# Allegro board CutiePi_V2_3.brd
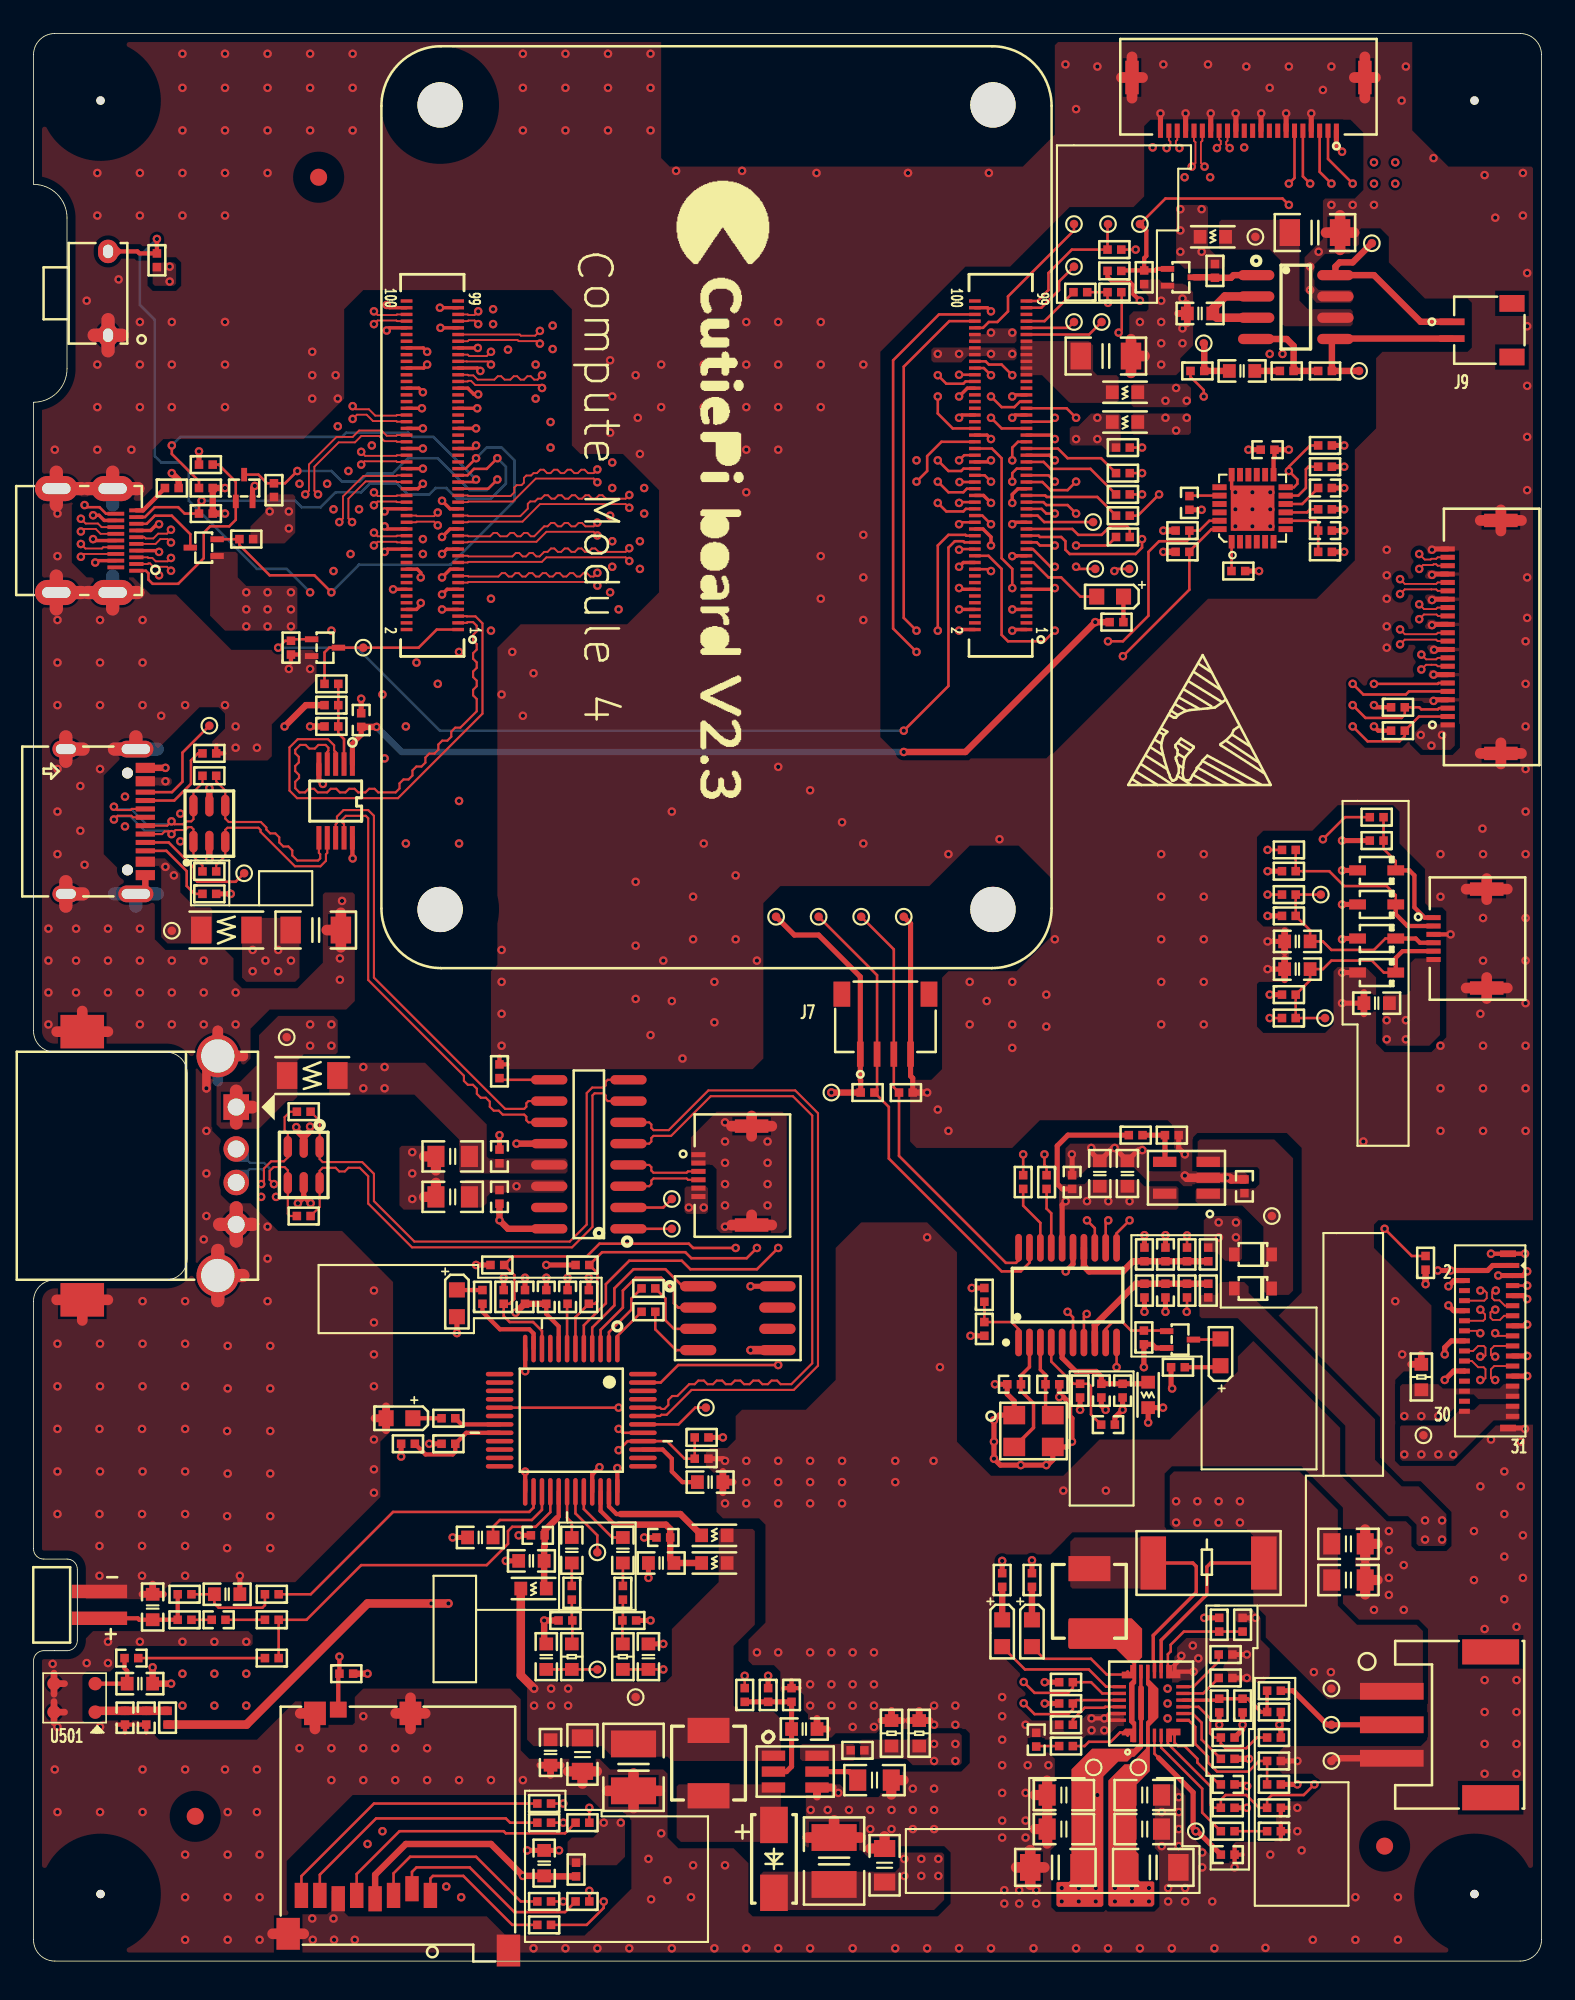
[diagram p0: board, top side]
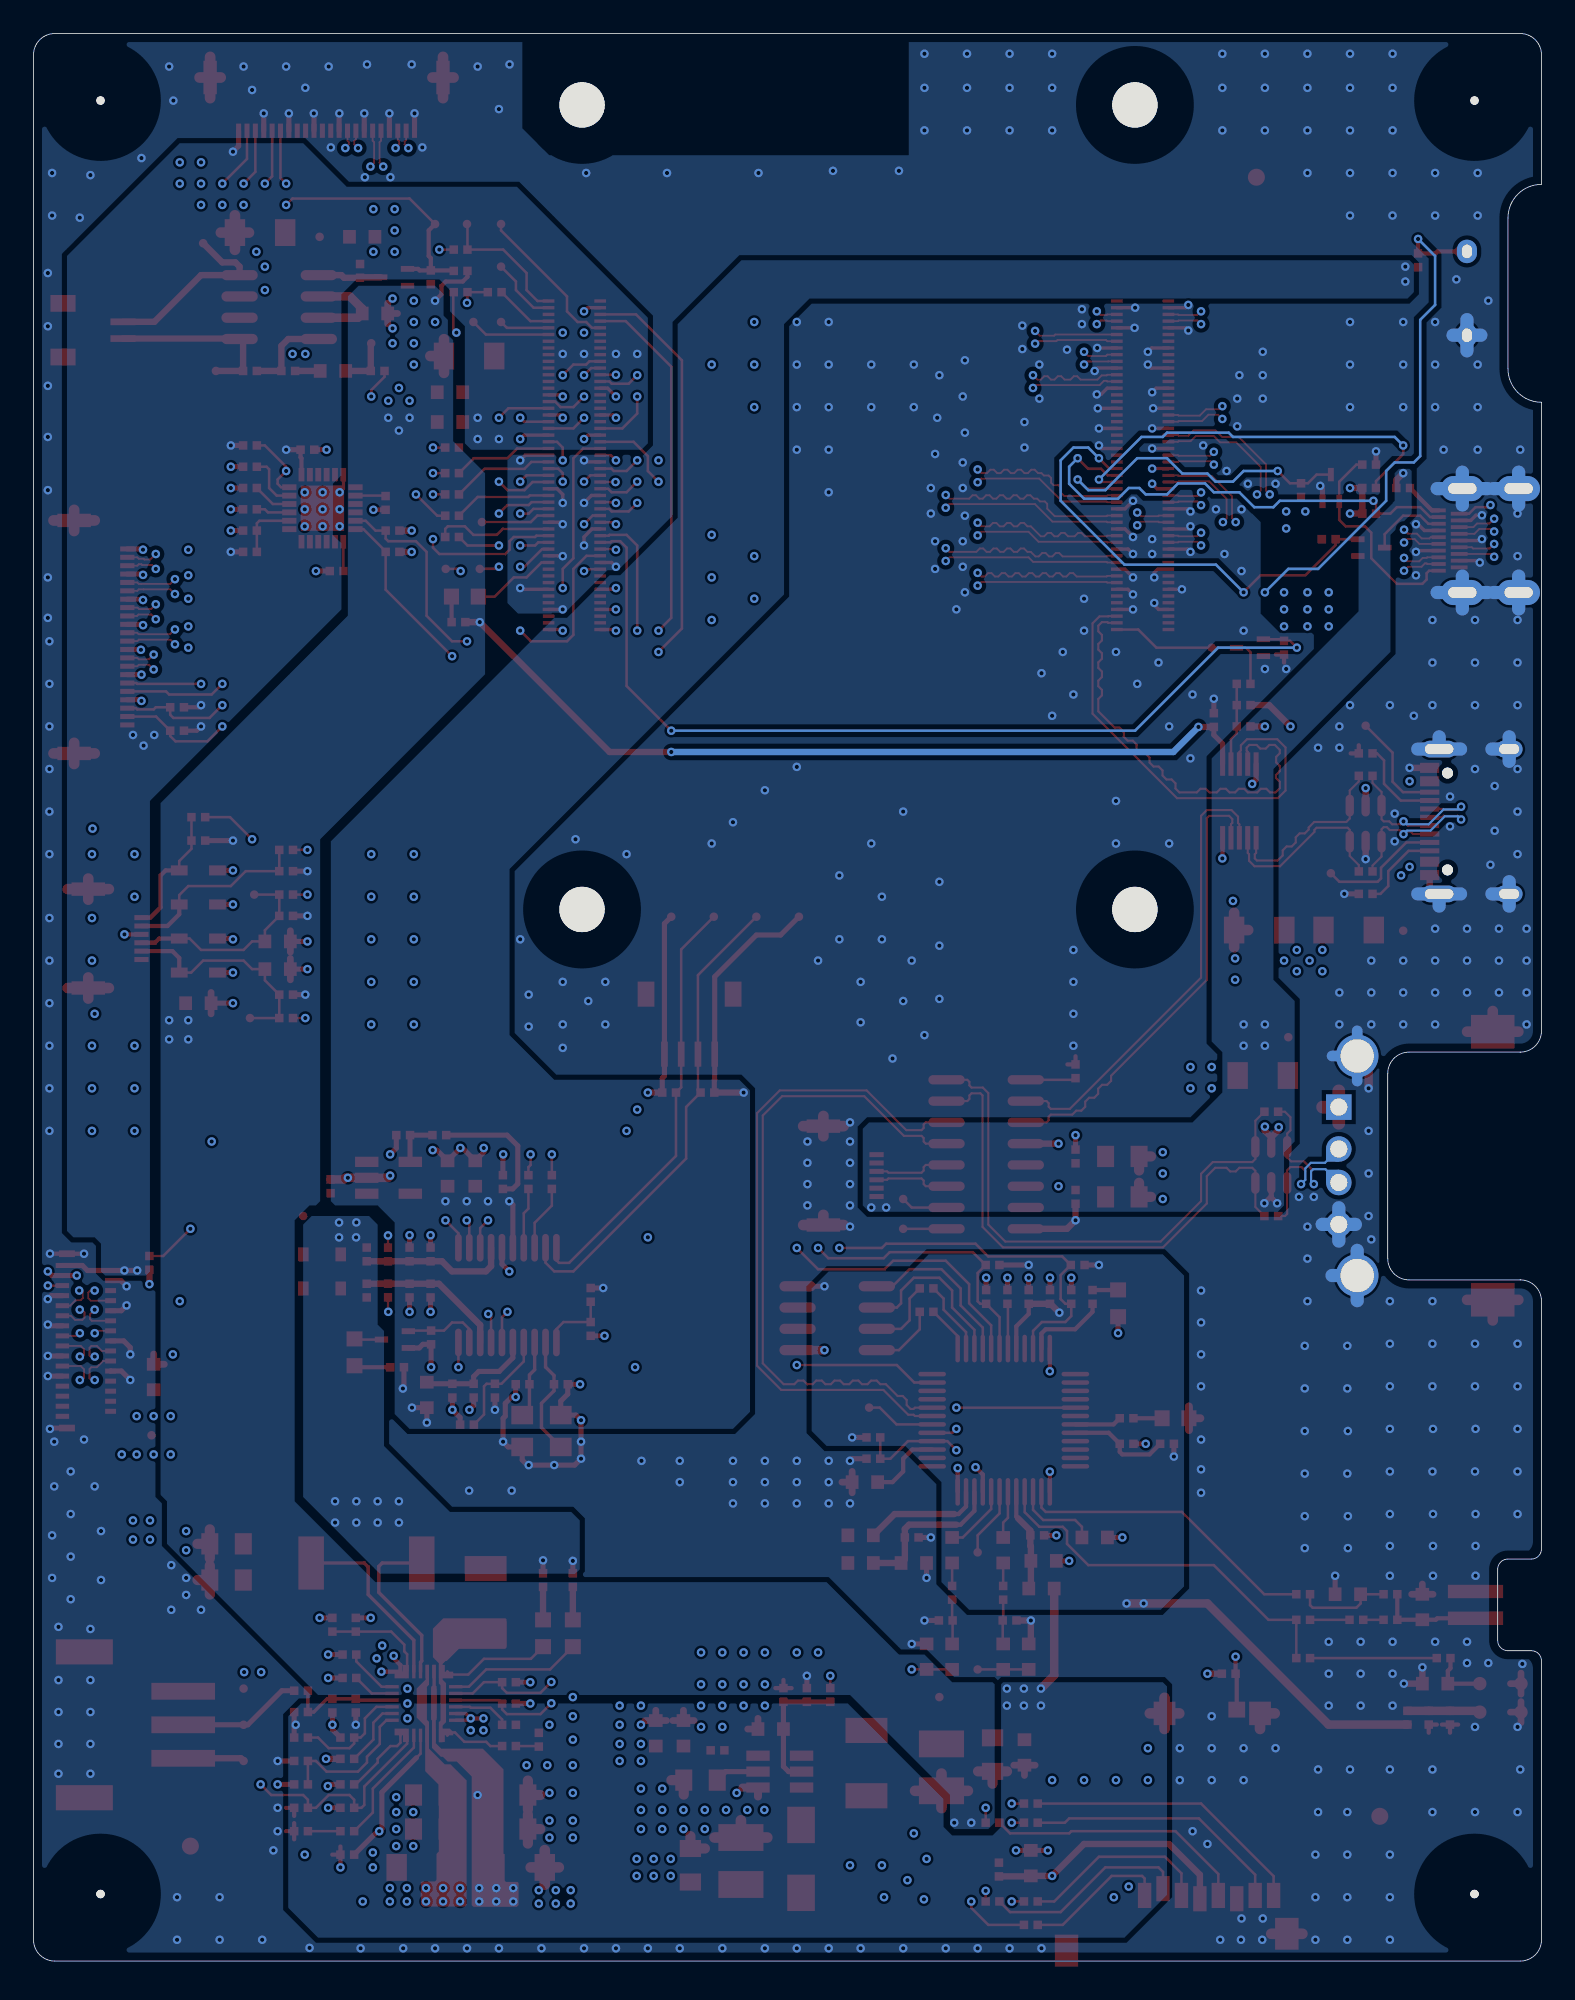
[diagram p1: board, bottom side, seen from below]

Outline 90.01 x 115 mm; copper layers: TOP, GND02, L03, L04, GND05, BOTTOM. Coordinates in mm from the lower left corner of the outline.
Outline path: 0,113.73 arc(0.37,114.63) 1.27,115 88.74,115 arc(89.64,114.63) 90.01,113.73 90.01,1.27 arc(89.64,0.37) 88.74,0 1.27,0 arc(0.37,0.37) 0,1.27 0,17.91 arc(0.18,18.34) 0.61,18.52 1.27,18.52 2.01,18.52 arc(2.44,18.7) 2.62,19.13 2.62,23.37 arc(2.44,23.8) 2.01,23.98 0.61,23.98 arc(0.18,24.16) 0,24.59 0,39.37 arc(0.37,40.27) 1.27,40.64 7.91,40.64 arc(8.81,41.01) 9.18,41.91 9.18,52.96 arc(8.81,53.86) 7.91,54.23 1.27,54.23 arc(0.37,54.6) 0,55.5 0,93 arc(1.41,93.59) 2,95 2,104 arc(1.41,105.41) 0,106 0,113.73

## Design rules (mm)
net group DP_N12951086: nets N12951060 N12951086
net group N13167521: nets N13167521 N13167621
net group RXD0: nets N12403491 RXD0
net group TXD0: nets N12403489 TXD0
net group USB1_: nets USB1_DM USB1_DP
net group USB2_: nets USB2_DM USB2_DP
net group USB3_DM: nets USB3_DM USB3_DP
net group USB_DP: nets USB_DN USB_DP
net group USBH_DP: nets USBH_DN USBH_DP
net group USBS_DN: nets USBS_DN USBS_DP
net group BOOST_EN: nets BOOST_EN CHARGE_EN N12951318
net group CAM0: nets CAM0_CN CAM0_CP CAM0_DN0 CAM0_DN1 CAM0_DP0 CAM0_DP1
net group CAM1: nets CAM1_CN CAM1_CP CAM1_DN0 CAM1_DN1 CAM1_DN2 CAM1_DN3 CAM1_DP0 CAM1_DP1 CAM1_DP2 CAM1_DP3
net group DSI1: nets DSI1_CN DSI1_CP DSI1_DN0 DSI1_DN1 DSI1_DN2 DSI1_DN3 DSI1_DP0 DSI1_DP1 DSI1_DP2 DSI1_DP3
net group HDMI1: nets HDMI_CK_N HDMI_CK_P HDMI_D0_N HDMI_D0_P HDMI_D1_N HDMI_D1_P HDMI_D2_N HDMI_D2_P
net group VBUSA: nets N12836963

## Placement (name value [footprint] x y rotation side)
C2  47u/6.3V  [C1206]  16.85 61.51 0 top
C17  -  [C0402]  19.56 74.04 270 top
C20  47u/6.3V  [C1206]  76.49 103.12 0 top
C24  4.7u/16V  [C0603]  30.48 5.84 90 top
C68  0.1uF/50V  [C0603]  30.86 12.45 270 top
C69  1.0uF/25V  [C0805]  32.77 12.32 270 top
C73  0.1uF/50V  [C0603]  46.01 13.84 0 top
C74  0.22uF/50V  [C0805]  50.2 10.79 0 top
C76  4.7uF/50V  [C1210]  47.79 5.97 90 top
C78  0.22uF/50V  [C0805]  50.8 5.71 90 top
C80  0.1uF/50V  [C0603]  80.17 57.15 180 top
C81  0.1uF/50V  [C0603]  75.44 60.83 180 top
C82  1000pF/50V  [C0603]  75.44 59.18 180 top
C85  4.7uF/50V  [C1210]  35.81 11.56 90 top
C86  4.7u/16V  [C0603]  69.63 98.3 180 top
C87  0.39u/16V  [C0603]  72.14 94.87 0 top
C383  -  [C0402]  77.09 85.34 0 top
C384  -  [C0402]  77.09 87.88 0 top
C385  -  [C0402]  73.66 90.17 180 top
C386  -  [C0402]  68.99 87 90 top
C2474  -  [C0402]  63.74 34.03 270 top
C2475  -  [C0402]  58.53 34.41 180 top
C2476  -  [C0402]  60.82 34.41 0 top
C2477  -  [C0402]  61.99 46.48 90 top
C2478  4.7u/16V  [C0603]  63.64 46.99 90 top
C2479  -  [C0402]  65.01 34.03 270 top
C2480  -  [C0402]  72.28 46.22 90 top
C2481  4.7u/16V  [C0603]  65.29 46.99 90 top
C2483  -  [C0402]  59.85 13.21 270 top
C2484  47u/6.3V  [C1206]  60.99 5.59 180 top
C2485  10u/16V  [C0805]  61.5 7.87 180 top
C2486  10u/16V  [C0805]  61.5 9.91 180 top
C2487  47u/6.3V  [C1206]  66.84 5.59 0 top
C2488  10u/16V  [C0805]  66.33 7.87 0 top
C2489  10u/16V  [C0805]  66.33 9.91 0 top
C2490  10u/16V  [C0805]  78.49 24.89 0 top
C2491  10u/16V  [C0805]  78.49 22.73 0 top
C2492  -  [C0402]  71.28 6.35 0 top
C2493  -  [C0402]  71.28 10.54 0 top
C2495  -  [C0402]  27.81 48.01 90 top
C2496  10u/16V  [C0805]  25.02 48.01 180 top
C2497  10u/16V  [C0805]  25.02 45.59 180 top
C2501  4.7u/16V  [C0603]  29.72 23.88 180 top
C2502  -  [C0402]  30.1 25.4 180 top
C2503  -  [C0402]  37.59 25.27 180 top
C2504  4.7u/16V  [C0603]  37.47 23.75 180 top
C2505  47u/6.3V  [C1206]  64.01 95.76 0 top
C2507  4.7u/16V  [C0603]  26.67 25.27 180 top
C2508  -  [C0402]  6.73 14.52 90 top
C2509  -  [C0402]  5.46 14.52 270 top
C2510  100pF  [C0603]  6.35 16.55 0 top
C2511  -  [C0402]  30.61 39.62 90 top
C2512  -  [C0402]  27.81 45.59 270 top
C2513  val*  [C0603]  40.39 28.57 0 top
C2514  -  [C0402]  29.34 39.62 90 top
C2515  -  [C0402]  31.88 39.62 90 top
C2516  val*  [C0603]  35.18 24.51 270 top
C2517  val*  [C0603]  36.7 18.16 270 top
C2518  val*  [C0603]  32.13 24.51 270 top
C2519  val*  [C0603]  30.61 18.16 90 top
C2520  val*  [C0603]  11.56 21.88 0 top
C2521  -  [C0402]  11.05 20.36 180 top
C2522  val*  [C0603]  7.11 21.12 90 top
C2523  -  [C0402]  64.14 32 0 top
C2524  -  [C0402]  5.84 18.07 180 top
C2525  -  [C0402]  67.56 42.16 90 top
C2526  -  [C0402]  67.56 40 270 top
D1  -  [LED0603]  64.26 81.41 0 top
D10  SS14-M3/61T  [DO-214AC]  44.2 6.1 90 top
D11  ESDLIN1524BJ  [SOD323]  80.17 63.04 0 top
D12  ESDLIN1524BJ  [SOD323]  80.17 65.07 0 top
D13  ESDLIN1524BJ  [SOD323]  80.17 58.97 0 top
D14  ESDLIN1524BJ  [SOD323]  80.17 61.01 0 top
D17  BAT54HT1  [DIO-SOD323]  72.79 40.13 180 top
D18  BAT54HT1  [DIO-SOD323]  72.79 42.16 180 top
D19  -  [LED0603]  70.85 36.32 270 top
D20  -  [LED0603]  57.82 19.56 90 top
D21  -  [LED0603]  59.6 19.56 90 top
D22  -  [LED0603]  25.27 39.24 90 top
D23  -  [LED0603]  21.84 32.38 0 top
F1  6V/2A  [1206]  11.51 61.51 0 top
F2  6V/0.5A  [1206]  16.64 52.83 180 top
FB2  BLM18PG121SH1  [SL0603]  70.39 102.87 0 top
FB7  BLM18PG121SH1  [SL0603]  66.53 33.78 90 top
FB8  BLM18PG121SH1  [SL0603]  40.64 23.75 0 top
FB9  BLM18PG121SH1  [SL0603]  29.84 22.23 180 top
FB10  BLM18PG121SH1  [SL0603]  65.15 93.6 180 top
FB12  BLM18PG121SH1  [SL0603]  65.15 91.82 180 top
FB13  val*  [SL0603]  40.64 25.4 0 top
J2  VAL  [TYPEC_6446_116FH1301]  4.02 67.99 270 top
J7  -  [SH1_0_4]  50.85 54.11 180 top
J9  -  [SH1_0_2]  84.67 97.3 90 top
J11  VAL  [CONFPC22_05MM_FH52_A]  86 79 90 top
J13  467651001  [MICRO_HDMI]  5.53 84.75 270 top
J14  -  [USB_AM]  12.1 47.45 0 top
J16  473521001_sd  [MOLEX_473521001]  21.78 7.81 0 top
J17  FH52-6S-0.5SH  [CONFPC6_05MM_FH52]  85.15 61 90 top
J21  FH26W-31S-0.3SHW  [CONFPC31_03MM_FH26W]  86.85 37 90 top
J23  VAL  [PH2_0_3]  81.07 14.1 270 top
J24  DF40C-100DS-0.4V  [FCI_10033853_CM]  57.73 89.24 270 top
J25  DF40C-100DS-0.4V  [FCI_10033853_CM]  23.81 89.24 270 top
J26  VAL  [CONFPC22_05MM_FH52_A]  72.52 110.79 180 top
J27  VAL  [MIC_4_5]  3.94 21.25 270 top
J28  VAL  [CONFPC6_05MM_FH52]  41.27 46.86 90 top
L5  10uH/20%  [SHC0402]  40.29 11.81 270 top
L634  1.5u  [SHC0402]  63.03 21.46 90 top
NOREF  -  [unnamed]  86.01 111 0 top
NOREF#2  -  [#2]  -66.42 -5.33 0 top
NOREF#3  -  [unnamed]  4 4 0 top
NOREF#4  -  [#2]  -66.42 36.7 0 top
NOREF#5  val  [unnamed#2]  24.27 110.74 0 top
NOREF#6  val  [unnamed#2]  57.27 110.74 0 top
NOREF#7  val  [unnamed#2]  24.27 62.74 0 top
NOREF#8  -  [#2]  41.4 90.09 270 top
NOREF#9  val  [unnamed#2]  57.27 62.74 0 top
NOREF#10  -  [unnamed]  86.01 4 0 top
NOREF#11  -  [#2]  40.77 86.74 0 top
NOREF#12  -  [unnamed#3]  80.64 6.86 0 top
NOREF#13  -  [unnamed#3]  9.65 8.64 0 top
NOREF#14  -  [#2]  -58.9 96.01 0 top
NOREF#15  -  [unnamed#3]  17.02 106.43 0 top
NOREF#16  -  [unnamed]  4 111 0 top
NOREF#17  -  [#2]  65.14 70.04 0 top
Q3  -  [SOT50P160X90-3N]  10.16 84.33 180 top
Q4  -  [SOT50P160X90-3N]  12.57 87.88 90 top
Q5  -  [SOT50P160X90-3N]  68.44 37.08 0 top
Q6  -  [SOT50P160X90-3N]  68.49 100.46 0 top
Q7  -  [SOT50P160X90-3N]  17.4 78.36 0 top
R3  -  [R0402]  64.64 79.88 0 top
R15  -  [R0402]  12.7 84.84 0 top
R16  -  [R0402]  81.44 74.8 0 top
R17  -  [R0402]  81.44 73.41 0 top
R18  -  [R0402]  14.35 87.76 270 top
R42  -  [R0402]  74.93 66.29 180 top
R43  -  [R0402]  80.17 68.25 180 top
R87  -  [R0402]  45.25 15.88 270 top
R88  -  [R0402]  42.45 15.88 90 top
R89  -  [R0402]  49.18 12.57 180 top
R90  3.3/1%  [R0603]  52.87 13.59 90 top
R91  3.3/1%  [R0603]  51.21 13.59 90 top
R114  -  [R0402]  74.93 65.02 180 top
R115  -  [R0402]  80.17 66.85 180 top
R117  -  [R0402]  74.93 62.36 0 top
R118  -  [R0402]  74.93 57.66 0 top
R120  -  [R0402]  74.93 56.26 180 top
R121  -  [R0402]  74.93 63.63 180 top
R122  -  [R0402]  16.13 44.45 180 top
R123  -  [R0402]  16.13 50.67 180 top
R124  -  [R0402]  70.52 100.84 270 top
R125  -  [R0402]  77.09 94.87 180 top
R126  -  [R0402]  74.8 94.87 180 top
R127  -  [R0402]  69.47 94.87 0 top
R272  -  [R0402]  62.47 34.03 270 top
R368  -  [R0402]  71.92 82.93 180 top
R370  -  [R0402]  77.09 84.07 180 top
R371  -  [R0402]  77.09 89.15 180 top
R373  -  [R0402]  77.09 86.61 180 top
R3039  -  [R0402]  56.75 37.71 270 top
R3040  -  [R0402]  56.75 39.75 90 top
R3041  -  [R0402]  60.47 46.48 270 top
R3042  -  [R0402]  59.07 46.48 270 top
R3043  -  [R0402]  49.78 51.82 0 top
R3044  -  [R0402]  52.07 51.82 0 top
R3049  -  [R0402]  67.94 49.28 180 top
R3051  -  [R0402]  65.79 49.28 0 top
R3052  -  [R0402]  70.12 42.16 90 top
R3053  -  [R0402]  66.31 42.16 90 top
R3054  -  [R0402]  7.37 101.47 270 top
R3057  -  [R0402]  83.09 41.66 90 top
R3058  -  [R0402]  8.26 87.88 0 top
R3059  -  [R0402]  66.28 37.21 90 top
R3060  -  [R0402]  68.31 35.43 0 top
R3061  -  [R0402]  66.29 100.46 90 top
R3062  -  [R0402]  10.29 89.28 0 top
R3063  NC_3.3/1%  [R0603]  82.84 34.84 90 top
R3064  -  [R0402]  70.12 40 270 top
R3065  -  [R0402]  66.31 40 270 top
R3066  -  [R0402]  43.85 15.88 270 top
R3086  -  [R0402]  74.04 13.34 180 top
R3087  -  [R0402]  61.63 12.83 0 top
R3088  -  [R0402]  71.28 13.34 180 top
R3089  20m/1W  [R2512]  70.14 23.75 0 top
R3090  -  [R0402]  74.04 11.94 180 top
R3091  -  [R0402]  74.04 10.54 0 top
R3092  -  [R0402]  74.04 9.14 180 top
R3093  -  [R0402]  71.28 9.14 0 top
R3094  -  [R0402]  61.63 16.64 180 top
R3095  -  [R0402]  57.82 22.73 90 top
R3096  -  [R0402]  61.63 15.37 180 top
R3097  -  [R0402]  71.28 12.06 0 top
R3098  -  [R0402]  74.04 16.13 180 top
R3099  -  [R0402]  61.63 14.1 0 top
R3100  -  [R0402]  59.6 22.73 90 top
R3101  -  [R0402]  70.77 15.24 90 top
R3102  -  [R0402]  70.77 20.07 270 top
R3103  -  [R0402]  72.17 15.24 90 top
R3104  -  [R0402]  72.17 20.07 270 top
R3105  -  [R0402]  71.28 7.75 180 top
R3106  -  [R0402]  71.15 16.89 180 top
R3107  -  [R0402]  71.15 18.29 180 top
R3108  -  [R0402]  74.04 7.75 0 top
R3132  -  [R0402]  18.67 17.14 0 top
R3133  -  [R0402]  10.5 72.05 0 top
R3134  -  [R0402]  10.5 63.67 0 top
R3137  -  [R0402]  74.04 14.86 180 top
R3138  -  [R0402]  30.48 2.16 180 top
R3139  -  [R0402]  32.77 3.56 180 top
R3140  -  [R0402]  30.48 3.56 180 top
R3141  -  [R0402]  32.77 8.26 180 top
R3142  -  [R0402]  30.48 8.26 180 top
R3143  -  [R0402]  30.48 9.4 180 top
R3145  -  [R0402]  64.52 100.84 180 top
R3149  -  [R0402]  27.81 53.09 270 top
R3153  -  [R0402]  32.38 5.46 270 top
R3154  -  [R0402]  68.85 42.16 90 top
R3155  -  [R0402]  68.85 40 270 top
R3156  -  [R0402]  62.48 99.57 180 top
R3157  -  [R0402]  65.02 90.3 0 top
R3158  -  [R0402]  8 14.52 90 top
R3160  -  [R0402]  33.15 39.62 270 top
R3161  -  [R0402]  10.5 70.71 0 top
R3162  -  [R0402]  10.5 65.01 0 top
R3163  -  [R0402]  17.78 73.66 0 top
R3164  -  [R0402]  17.78 74.93 180 top
R3165  -  [R0402]  68.58 85.34 180 top
R3166  -  [R0402]  68.58 84.07 180 top
R3167  -  [R0402]  77.09 90.42 180 top
R3168  -  [R0402]  10.29 87.88 0 top
R3169  -  [R0402]  10.29 86.36 0 top
R3172  -  [R0402]  17.78 76.2 0 top
R3173  -  [R0402]  32.77 41.53 180 top
R3174  -  [R0402]  36.7 38.73 180 top
R3175  -  [R0402]  36.7 40.13 180 top
R3176  -  [R0402]  27.69 41.53 180 top
R3177  -  [R0402]  28.07 39.62 270 top
R3178  -  [R0402]  26.8 39.62 90 top
R3179  -  [R0402]  24.77 32.38 180 top
R3180  -  [R0402]  22.35 30.86 180 top
R3181  -  [R0402]  24.77 30.86 0 top
R3182  -  [R0402]  39.88 31.24 0 top
R3183  -  [R0402]  39.88 29.97 180 top
R3184  val*  [R0603]  35.18 18.16 270 top
R3185  -  [R0402]  35.18 21.97 270 top
R3186  -  [R0402]  35.56 20.32 0 top
R3187  -  [R0402]  32.13 21.97 270 top
R3188  val*  [R0603]  32.13 18.16 270 top
R3189  -  [R0402]  31.75 20.32 0 top
R3190  -  [R0402]  14.22 21.88 180 top
R3191  -  [R0402]  9.02 20.36 180 top
R3192  -  [R0402]  9.02 21.88 180 top
R3193  -  [R0402]  64.52 102.11 180 top
R3194  -  [R0402]  65.02 88.77 180 top
R3195  -  [R0402]  65.02 87.5 180 top
R3196  -  [R0402]  15.37 78.36 90 top
R3197  -  [R0402]  65.02 84.96 0 top
R3198  -  [R0402]  65.02 86.23 180 top
R3199  -  [R0402]  14.22 18.07 180 top
R3200  -  [R0402]  14.22 20.36 180 top
R3201  -  [R0402]  64.52 99.57 0 top
SW2  TC-0143  [BUTTON]  4.45 99.5 270 top
TP28  VAL  [TESTPOINT_20MIL]  76.83 63.63 90 top
TP29  VAL  [TESTPOINT_20MIL]  77.09 56.26 90 top
TP30  VAL  [TESTPOINT_20MIL]  35.94 15.75 270 top
TP33  VAL  [TESTPOINT_20MIL]  82.96 31.37 0 top
TP41  VAL  [TESTPOINT_20MIL]  8.26 61.47 0 top
TP43  VAL  [TESTPOINT_20MIL]  63.28 11.56 0 top
TP44  VAL  [TESTPOINT_20MIL]  77.47 16.26 0 top
TP45  VAL  [TESTPOINT_20MIL]  69.38 7.75 0 top
TP46  VAL  [TESTPOINT_20MIL]  65.95 11.56 0 top
TP47  VAL  [TESTPOINT_20MIL]  77.47 14.1 0 top
TP52  VAL  [TESTPOINT_20MIL]  15.11 55.12 0 top
TP57  VAL  [TESTPOINT_20MIL]  72.93 102.87 90 top
TP58  VAL  [TESTPOINT_20MIL]  69.85 96.52 90 top
TP59  VAL  [TESTPOINT_20MIL]  66.04 103.63 90 top
TP60  VAL  [TESTPOINT_20MIL]  79.12 94.87 0 top
TP61  VAL  [TESTPOINT_20MIL]  79.88 102.49 0 top
TP62  VAL  [TESTPOINT_20MIL]  46.86 62.31 0 top
TP63  VAL  [TESTPOINT_20MIL]  49.4 62.31 0 top
TP64  VAL  [TESTPOINT_20MIL]  73.91 44.45 0 top
TP65  VAL  [TESTPOINT_20MIL]  47.62 51.82 0 top
TP77  VAL  [TESTPOINT_20MIL]  63.75 97.79 90 top
TP78  VAL  [TESTPOINT_20MIL]  62.1 97.79 90 top
TP79  VAL  [TESTPOINT_20MIL]  62.1 101.09 90 top
TP80  VAL  [TESTPOINT_20MIL]  64.14 103.63 90 top
TP81  VAL  [TESTPOINT_20MIL]  33.66 24.38 270 top
TP83  VAL  [TESTPOINT_20MIL]  62.1 103.63 90 top
TP84  VAL  [TESTPOINT_20MIL]  65.41 83.06 90 top
TP89  VAL  [TESTPOINT_20MIL]  63.37 83.06 90 top
TP90  VAL  [TESTPOINT_20MIL]  63.25 85.85 90 top
TP91  VAL  [TESTPOINT_20MIL]  77.47 11.94 0 top
TP92  VAL  [TESTPOINT_20MIL]  10.5 73.7 0 top
TP93  VAL  [TESTPOINT_20MIL]  12.57 64.9 0 top
TP94  VAL  [TESTPOINT_20MIL]  19.68 78.36 0 top
TP95  VAL  [TESTPOINT_20MIL]  40.13 33.02 180 top
TP97  VAL  [TESTPOINT_20MIL]  33.66 17.4 180 top
TP98  VAL  [TESTPOINT_20MIL]  44.32 62.31 0 top
TP99  VAL  [TESTPOINT_20MIL]  51.94 62.31 0 top
TP100  VAL  [TESTPOINT_20MIL]  38.1 43.69 90 top
TP101  VAL  [TESTPOINT_20MIL]  38.1 45.47 90 top
U3  CM108AH  [QFN48_05MM_0707MMLTS]  32.1 32.27 270 top
U5  IP4234CZ6  [TSOP6]  16.13 47.5 180 top
U6  -  [SOT23_6B]  45.47 11.3 270 top
U12  LM4871MX  [SOIC8_1D27MM]  75.34 98.68 270 top
U18  stm32f030f4p6  [TSSOP20_0D65MM]  61.72 39.73 0 top
U57  MPU6050  [QFN24_05MM_0404MML]  72.76 86.68 90 top
U60  -  [SOT23_5]  68.82 46.73 90 top
U501  -  [LGA5_CAV_4P1X3P1MM]  3.68 16.55 270 top
U580  AT93C46  [SOIC8]  42.04 38.35 270 top
U597  MP2636GR  [QFN-30]  66.71 15.37 90 top
U600  val  [SOP16_1P27_HS8836A]  33.15 48.13 90 top
U601  val  [TSOP6]  10.5 67.86 0 top
U602  -  [SOP10_20_120A]  18.03 69.22 180 top
Y2  -  [XTAL_3225_25M_A]  59.69 31.62 180 top

## Library data of the parts
C2 C20 C2484 C2487 C2505 = CAP_3216_6.3V_47u: Tolerance: tol*
C17 C383-C386 C2474 C2477 C2479 C2483 C2492 C2493 C2495 C2502 C2503 C2508 C2509 C2511 C2512 C2514 C2515 C2521 C2523-C2526 = CAP_1005_6.3V_100n
C24 C86 C87 C2478 C2481 C2501 C2504 C2507 C2513 C2516 C2518 C2520 = CAP_1608_6.3V_4.7u: Tolerance: tol*
C68 C69 C73 C74 C76 C78 C82 C85 C2510 C2517 C2519 C2522 = CAP: Tolerance: tol*
C80 C81 = CAP_0: Tolerance: tol*
C2475 C2476 = C_0603_22P/50V/5%
C2480 = CAP_1005_6.3V_1u
C2485 C2486 C2488-C2491 C2496 C2497 = CAP_2012_6.3V_10u: Tolerance: tol*
D1 = LED_1608_RED_0
D10 = S100: User Part Number: pn
D11-D14 = SMAJ30CA: User Part Number: PN
D17 D18 = DIODE_0: User Part Number: PN
D19-D23 = LED_1608_GREEN_0
F1 F2 = FUSE_POLY_2.0A_6V: Tolerance: tol*
FB2 FB7-FB10 FB12 FB13 = INDUCTOR_0: Tolerance: tol*; room: USB+5V
J2 = CON_HDMI_RA_3: User Part Number: PN
J7 = A2002WV-6P_7
J9 = A2002WV-6P_8
J11 J26 = CON_22W_FFC_0: User Part Number: PN
J13 = CON_HDMI_RA: User Part Number: PN
J14 = CON_USBA_RA_PTH_0
J16 = CON_uSD_2: User Part Number: PN
J17 J28 = A2002WV-6P_3: User Part Number: PN
J21 = CON32_1: User Part Number: PN
J23 = A2002WV-6P_4: User Part Number: PN
J24 J25 = CON_200W_DDR2SODIMM_CM_2: User Part Number: PN
J27 = A2002WV-6P_8: User Part Number: PN
L5 = IND: User Part Number: pn
L634 = IND_4u7_SRN4018-4R7M: User Part Number: pn
NOREF#5-NOREF#7 NOREF#9 = -: User Part Number: pn
Q3-Q7 = MOSFET_N_DMG1012T
R3 R3060 R3178 R3179 = RES_1005_470R
R15 R18 R3059 R3061 R3062 R3133 R3134 R3145 R3160 R3173 R3176 R3177 R3180-R3183 R3196 = RES_1005_100K
R16 R17 = RES_1005_1.8K
R42 R43 R87-R89 R120-R123 R127 R368 R370 R371 R373 R3052 R3057 R3064 R3066 R3086-R3088 R3090-R3093 R3095 R3097-R3108 R3137 R3149 R3153-R3158 R3161-R3164 R3167 R3172 R3174 R3175 R3185-R3187 R3189-R3195 R3197-R3201 = RES
R90 R91 R3063 R3089 R3184 R3188 = RES: Tolerance: tol*
R114 R115 R117 R118 R124-R126 R3049 R3051 R3053 R3065 R3165 R3166 R3168 R3169 = RES_0
R272 R3054 = R_0603_10K/5%
R3039 R3040 = R_0402_22R/5%
R3041 R3042 R3058 R3094 R3096 = R_1: signal model: DEFAULT_RESISTOR_0.001OHM_1_2
R3043 R3044 = R_0603/4.7K/5%
R3132 R3138-R3143 = RES_1005_47K
SW2 = SKEG_DIP2_2: User Part Number: PN
TP28-TP30 TP33 TP41 TP43-TP47 TP52 TP57-TP65 TP77-TP81 TP83 TP84 TP89-TP95 TP97-TP101 = Test pad: Tolerance: *; User Part Number: PN; room: P10-PMIC
U3 = LSD4WF-00007010_2: User Part Number: pn
U5 U601 = TMP100-Q1_0: User Part Number: pn
U6 = TPS61165TDB
U12 = SMD_EEPROM_SO8_0: User Part Number: pn
U18 = XF6000SYE_1: User Part Number: pn
U57 = TUSB1210BRHBT_2: User Part Number: PN
U60 = LP3470/SOT23_1
U501 = ADMP421_LGA5_1
U580 = PCA9306IDCURQ1_0: User Part Number: pn
U597 = STM8AF6226TA_5: User Part Number: PN
U600 = NEO-M8L_2: User Part Number: pn
U602 = IC_MUX2-1_USB_0
Y2 = X_0

## Footprints (pads in the part's own frame, mm; a bottom-side part is the same pattern mirrored in y, then rotated)
1206
  rect 1.219x1.6 smd: 1(-1.5,0) 2(1.5,0)
BUTTON
  oval 1.4x1.2 hole 0.8x0.6: 1(2.5,0) 2(-2.5,0)
C0402
  rect 0.508x0.508 smd: 1(-0.41,0) 2(0.41,0)
C0603
  rect 0.762x0.813 smd: 1(-0.76,0) 2(0.76,0)
C0805
  rect 1.016x1.27 smd: 1(-1,0) 2(1,0)
C1206
  rect 1.219x1.6 smd: 1(-1.5,0) 2(1.5,0)
C1210
  rect 1.6x2.692 smd: 1(-1.4,0) 2(1.4,0)
CONFPC6_05MM_FH52
  rect 0.3x0.85 smd: 1(1.25,1.587) 2(0.75,1.587) 3(0.25,1.587) 4(-0.25,1.587) 5(-0.75,1.587) 6(-1.25,1.587)
  rect 0.8x2 smd: 7(-2.95,-1.587) 8(2.95,-1.587)
CONFPC22_05MM_FH52_A
  rect 0.3x0.85 smd: 1(5.25,1.587) 2(4.75,1.587) 3(4.25,1.587) 4(3.75,1.587) 5(3.25,1.587) 6(2.75,1.587) 7(2.25,1.587) 8(1.75,1.587) 9(1.25,1.587) 10(0.75,1.587) 11(0.25,1.587) 12(-0.25,1.587) 13(-0.75,1.587) 14(-1.25,1.587) 15(-1.75,1.587) 16(-2.25,1.587) 17(-2.75,1.587) 18(-3.25,1.587) 19(-3.75,1.587) 20(-4.25,1.587) 21(-4.75,1.587) 22(-5.25,1.587)
  rect 0.8x2 smd: G1(-6.95,-1.587) G2(6.95,-1.587)
CONFPC31_03MM_FH26W
  rect 0.3x0.8 smd: 1(4.5,-1.437) 3(3.9,-1.437) 5(3.3,-1.437) 7(2.7,-1.437) 9(2.1,-1.437) 11(1.5,-1.437) 13(0.9,-1.437) 15(0.3,-1.437) 17(-0.3,-1.437) 19(-0.9,-1.437) 21(-1.5,-1.437) 23(-2.1,-1.437) 25(-2.7,-1.437) 27(-3.3,-1.437) 29(-3.9,-1.437) 31(-4.5,-1.437)
  rect 0.3x0.65 smd: 2(4.2,1.437) 4(3.6,1.437) 6(3,1.437) 8(2.4,1.437) 10(1.8,1.437) 12(1.2,1.437) 14(0.6,1.437) 16(0,1.437) 18(-0.6,1.437) 20(-1.2,1.437) 22(-1.8,1.437) 24(-2.4,1.437) 26(-3,1.437) 28(-3.6,1.437) 30(-4.2,1.437)
  rect 0.4x0.95 smd: G1(-5.2,-1.165) G2(5.2,-1.165)
DIO-SOD323
  rect 0.63x0.83 smd: 1(-1.115,0) 2(1.115,0)
DO-214AC
  rect 2.17x1.65 smd: A(2.025,0) C(-2.025,0)
FCI_10033853_CM
  rect 0.2x0.7 smd: 1(9.8,1.54) 2(9.8,-1.54) 3(9.4,1.54) 4(9.4,-1.54) 5(9,1.54) 6(9,-1.54) 7(8.6,1.54) 8(8.6,-1.54) 9(8.2,1.54) 10(8.2,-1.54) 11(7.8,1.54) 12(7.8,-1.54) 13(7.4,1.54) 14(7.4,-1.54) 15(7,1.54) 16(7,-1.54) 17(6.6,1.54) 18(6.6,-1.54) 19(6.2,1.54) 20(6.2,-1.54) 21(5.8,1.54) 22(5.8,-1.54) 23(5.4,1.54) 24(5.4,-1.54) 25(5,1.54) 26(5,-1.54) 27(4.6,1.54) 28(4.6,-1.54) 29(4.2,1.54) 30(4.2,-1.54) 31(3.8,1.54) 32(3.8,-1.54) 33(3.4,1.54) 34(3.4,-1.54) 35(3,1.54) 36(3,-1.54) 37(2.6,1.54) 38(2.6,-1.54) 39(2.2,1.54) 40(2.2,-1.54) 41(1.8,1.54) 42(1.8,-1.54) 43(1.4,1.54) 44(1.4,-1.54) 45(1,1.54) 46(1,-1.54) 47(0.6,1.54) 48(0.6,-1.54) 49(0.2,1.54) 50(0.2,-1.54) 51(-0.2,1.54) 52(-0.2,-1.54) 53(-0.6,1.54) 54(-0.6,-1.54) 55(-1,1.54) 56(-1,-1.54) 57(-1.4,1.54) 58(-1.4,-1.54) 59(-1.8,1.54) 60(-1.8,-1.54) 61(-2.2,1.54) 62(-2.2,-1.54) 63(-2.6,1.54) 64(-2.6,-1.54) 65(-3,1.54) 66(-3,-1.54) 67(-3.4,1.54) 68(-3.4,-1.54) 69(-3.8,1.54) 70(-3.8,-1.54) 71(-4.2,1.54) 72(-4.2,-1.54) 73(-4.6,1.54) 74(-4.6,-1.54) 75(-5,1.54) 76(-5,-1.54) 77(-5.4,1.54) 78(-5.4,-1.54) 79(-5.8,1.54) 80(-5.8,-1.54) 81(-6.2,1.54) 82(-6.2,-1.54) 83(-6.6,1.54) 84(-6.6,-1.54) 85(-7,1.54) 86(-7,-1.54) 87(-7.4,1.54) 88(-7.4,-1.54) 89(-7.8,1.54) 90(-7.8,-1.54) 91(-8.2,1.54) 92(-8.2,-1.54) 93(-8.6,1.54) 94(-8.6,-1.54) 95(-9,1.54) 96(-9,-1.54) 97(-9.4,1.54) 98(-9.4,-1.54) 99(-9.8,1.54) 100(-9.8,-1.54)
LED0603
  rect 0.9x0.95 smd: 1(0.8,0) 2(-0.8,0)
LGA5_CAV_4P1X3P1MM
  round 0.8 smd: 1(1.7,0) 2(1.7,-2.46) 3(0,-2.46) 4(0,0)
MIC_4_5
  rect 0.8x3.3 smd: 1(-0.8,0) 2(0.8,0)
MICRO_HDMI
  rect 0.23x0.85 smd: 1(1.8,0.612) 3(1.4,0.612) 5(1,0.612) 7(0.6,0.612) 9(0.2,0.612) 11(-0.2,0.612) 13(-0.6,0.612) 15(-1,0.612) 17(-1.4,0.612) 19(-1.8,0.612)
  rect 0.23x1 smd: 2(1.6,-0.612) 4(1.2,-0.612) 6(0.8,-0.612) 8(0.4,-0.612) 10(0,-0.612) 12(-0.4,-0.612) 14(-0.8,-0.612) 16(-1.2,-0.612) 18(-1.6,-0.612)
  oval 1.5x2.55 hole 0.65x1.7: 20(3.1,-4.163) 21(-3.1,-0.802) 22(3.1,-0.802) 23(-3.1,-4.163)
MOLEX_473521001
  rect 0.8x1.5 smd: 1(1.915,-3.898) 2(0.815,-3.498) 3(-0.285,-3.898) 4(-1.385,-4.098) 5(-2.485,-3.898) 6(-3.585,-4.098) 7(-4.685,-3.898) 8(-5.785,-3.898)
  rect 1x0.95 smd: 9(-3.585,7.187)
  rect 1.4x1.9 smd: 10(6.575,-7.187) 11(-6.575,-6.187)
  rect 1.3x1.4 smd: 12(-4.975,6.962) 13(0.725,6.962)
PH2_0_3
  rect 1.501x3.401 smd: (-4.351,5.9) (4.351,5.9)
  rect 1.001x3.8 smd: 1(-1.999,0) 2(0,0) 3(1.999,0)
QFN24_05MM_0404MML
  rect 0.8x0.35 smd: 1(-2,1.25) 2(-2,0.75) 3(-2,0.25) 4(-2,-0.25) 5(-2,-0.75) 6(-2,-1.25) 13(2,-1.25) 14(2,-0.75) 15(2,-0.25) 16(2,0.25) 17(2,0.75) 18(2,1.25)
  rect 0.35x0.85 smd: 7(-1.25,-1.975) 8(-0.75,-1.975) 9(-0.25,-1.975) 10(0.25,-1.975) 11(0.75,-1.975) 12(1.25,-1.975) 19(1.25,1.975) 20(0.75,1.975) 21(0.25,1.975) 22(-0.25,1.975) 23(-0.75,1.975) 24(-1.25,1.975)
  rect 2.7x2.6 smd: 25(0,0)
QFN48_05MM_0707MMLTS
  oval 1.65x0.27 smd: 1(-4.275,2.75) 2(-4.275,2.25) 3(-4.275,1.75) 4(-4.275,1.25) 5(-4.275,0.75) 6(-4.275,0.25) 7(-4.275,-0.25) 8(-4.275,-0.75) 9(-4.275,-1.25) 10(-4.275,-1.75) 11(-4.275,-2.25) 12(-4.275,-2.75) 25(4.275,-2.75) 26(4.275,-2.25) 27(4.275,-1.75) 28(4.275,-1.25) 29(4.275,-0.75) 30(4.275,-0.25) 31(4.275,0.25) 32(4.275,0.75) 33(4.275,1.25) 34(4.275,1.75) 35(4.275,2.25) 36(4.275,2.75)
  oval 0.27x1.65 smd: 13(-2.75,-4.275) 14(-2.25,-4.275) 15(-1.75,-4.275) 16(-1.25,-4.275) 17(-0.75,-4.275) 18(-0.25,-4.275) 19(0.25,-4.275) 20(0.75,-4.275) 21(1.25,-4.275) 22(1.75,-4.275) 23(2.25,-4.275) 24(2.75,-4.275) 37(2.75,4.275) 38(2.25,4.275) 39(1.75,4.275) 40(1.25,4.275) 41(0.75,4.275) 42(0.25,4.275) 43(-0.25,4.275) 44(-0.75,4.275) 45(-1.25,4.275) 46(-1.75,4.275) 47(-2.25,4.275) 48(-2.75,4.275)
QFN-30
  custom 0.8x0.7 smd: 1(-1.9,1.4) 8(-1.9,-1.4) 15(1.9,-1.4) 22(1.9,1.4)
  rect 0.8x0.2 smd: 2(-1.9,1) 3(-1.9,0.6) 4(-1.9,0.2) 5(-1.9,-0.2) 6(-1.9,-0.6) 7(-1.9,-1) 16(1.9,-1) 17(1.9,-0.6) 18(1.9,-0.2) 19(1.9,0.2) 20(1.9,0.6) 21(1.9,1)
  rect 0.2x0.8 smd: 9(-1,-1.9) 10(-0.6,-1.9) 11(-0.2,-1.9) 12(0.2,-1.9) 13(0.6,-1.9) 14(1,-1.9) 23(1,1.9) 24(0.6,1.9) 25(0.2,1.9) 26(-0.2,1.9) 27(-0.6,1.9) 28(-1,1.9)
  rect 1.8x0.3 smd: 29(0,0.6) 30(0,0)
R0402
  rect 0.508x0.508 smd: 1(-0.41,0) 2(0.41,0)
R0603
  rect 0.762x0.813 smd: 1(-0.76,0) 2(0.76,0)
R2512
  rect 1.524x3.175 smd: 1(-3.3,0) 2(3.3,0)
SH1_0_2
  rect 1x1.5 smd: (-1.6,-3.58) (1.6,-3.58)
  rect 0.4x1.5 smd: 1(0.5,0) 2(-0.5,0)
SH1_0_4
  rect 1x1.5 smd: (-2.6,-3.58) (2.6,-3.58)
  rect 0.4x1.5 smd: 1(1.5,0) 2(0.5,0) 3(-0.5,0) 4(-1.5,0)
SHC0402
  rect 1.5x2.5 smd: 1(-1.95,0) 2(1.95,0)
SL0603
  rect 0.762x0.813 smd: 1(-0.76,0) 2(0.76,0)
SOD323
  rect 1x0.6 smd: A(-1.14,0) C(1.14,0)
SOIC8
  oval 0.61x2.17 smd: 1(-1.905,-2.365) 2(-0.635,-2.365) 3(0.635,-2.365) 4(1.905,-2.365) 5(1.905,2.365) 6(0.635,2.365) 7(-0.635,2.365) 8(-1.905,2.365)
SOIC8_1D27MM
  oval 0.61x2.17 smd: 1(-1.905,-2.365) 2(-0.635,-2.365) 3(0.635,-2.365) 4(1.905,-2.365) 5(1.905,2.365) 6(0.635,2.365) 7(-0.635,2.365) 8(-1.905,2.365)
SOP10_20_120A
  rect 0.3x1.4 smd: 1(-1,-2.2) 2(-0.5,-2.2) 3(0,-2.2) 4(0.5,-2.2) 5(1,-2.2) 6(1,2.2) 7(0.5,2.2) 8(0,2.2) 9(-0.5,2.2) 10(-1,2.2)
SOP16_1P27_HS8836A
  oval 0.56x2.17 smd: 1(-4.445,-2.365) 2(-3.175,-2.365) 3(-1.905,-2.365) 4(-0.635,-2.365) 5(0.635,-2.365) 6(1.905,-2.365) 7(3.175,-2.365) 8(4.445,-2.365) 9(4.445,2.365) 10(3.175,2.365) 11(1.905,2.365) 12(0.635,2.365) 13(-0.635,2.365) 14(-1.905,2.365) 15(-3.175,2.365) 16(-4.445,2.365)
SOT23_5
  rect 0.61x1.397 smd: 1(-0.95,-1.3) 2(0,-1.3) 3(0.95,-1.3) 4(0.95,1.3) 5(-0.95,1.3)
SOT23_6B
  rect 0.61x1.397 smd: 1(-0.95,-1.3) 2(0,-1.3) 3(0.95,-1.3) 4(0.95,1.3) 5(0,1.3) 6(-0.95,1.3)
SOT50P160X90-3N
  rect 0.8x0.35 smd: 1(-0.8,0.5) 2(-0.8,-0.5) 3(0.8,0)
TESTPOINT_20MIL
  round 0.508 smd: 1(0,0)
TSOP6
  oval 0.5x1.3 smd: 1(-0.95,-1.075) 2(0,-1.075) 3(0.95,-1.075) 4(0.95,1.075) 5(0,1.075) 6(-0.95,1.075)
TSSOP20_0D65MM
  oval 0.4x1.65 smd: 1(-2.925,-2.825) 2(-2.275,-2.825) 3(-1.625,-2.825) 4(-0.975,-2.825) 5(-0.325,-2.825) 6(0.325,-2.825) 7(0.975,-2.825) 8(1.625,-2.825) 9(2.275,-2.825) 10(2.925,-2.825) 11(2.925,2.825) 12(2.275,2.825) 13(1.625,2.825) 14(0.975,2.825) 15(0.325,2.825) 16(-0.325,2.825) 17(-0.975,2.825) 18(-1.625,2.825) 19(-2.275,2.825) 20(-2.925,2.825)
TYPEC_6446_116FH1301
  round 0.65 hole 0.65 unplated: (-2.89,1.59) (2.89,1.59)
  rect 0.6x1.15 smd: A1_B12(-3.2,2.655) A4_B9(-2.4,2.655) B1_A12(3.2,2.655) B4_A9(2.4,2.655)
  rect 0.3x1.15 smd: A5(-1.25,2.655) A6(-0.25,2.655) A7(0.25,2.655) A8(1.25,2.655) B5(1.75,2.655) B6(0.75,2.655) B7(-0.75,2.655) B8(-1.75,2.655)
  oval 1x2.1 hole 0.6x1.7: G1(-4.32,2.09) G2(4.32,2.09)
  oval 1x1.6 hole 0.6x1.2: G3(-4.32,-2.09) G4(4.32,-2.09)
unnamed
  round 0.5 hole 3.4 unplated: (0,0)
unnamed#2
  round 2.7 hole 2.7 unplated: (0,0)
unnamed#3
  round 1.016 smd: (0,0)
USB_AM
  rect 1.524x1.524 hole 1.016: 1(0,3.5)
  round 1.524 hole 1.016: 2(0,1) 3(0,-1) 4(0,-3.5)
  round 2.54 hole 1.981: 5(-1.1,6.55) 6(-1.1,-6.55)
  rect 2.6x2 smd: 7(-9.189,8) 8(-9.189,-8)
XTAL_3225_25M_A
  rect 1.3x1.1 smd: 1(-1.15,-0.95) 2(1.15,-0.95) 3(1.15,0.95) 4(-1.15,0.95)

## Nets
3V3: C17.2 C80.1 FB12.1 J17.6 R3.1 R114.2 R115.2 R117.1 R118.1 R3066.1(A) R3145.2 R3153.1(A) U602.1(VCC)
3V3_SD: C24.1 J16.4(VDD) R3132.2 R3153.2(B)
5V_IN: C2.1 C2487.1 C2488.1 C2489.1 D17.2 F1.2(P2) R3064.2(B) R3091.2(B) R3093.2(B) R3164.2(B) TP46.1(PIN1) U597.4(VIN1) U597.19(VIN3) U597.30(VIN2) U601.5(PW)
GND: C2.2 C17.1 C20.2 C24.2 C68.2 C69.2 C73.2 C74.2 C76.2 C78.2 C80.2 C81.2 C82.2 C85.1 C86.2 C383.2 C384.2 C385.2 C386.1 C2474.2 C2475.2 C2476.2 C2477.2 C2478.2 C2479.2 C2480.2 C2481.2 C2483.1 C2484.2 C2485.2 C2486.2 C2487.2 C2488.2 C2489.2 C2490.2 C2491.2 C2492.2 C2493.2 C2495.2 C2496.2 C2497.2 C2501.2 C2502.2 C2503.2 C2504.2 C2505.2 C2507.2 C2508.1 C2509.2 C2510.2 C2511.2 C2512.2 C2513.2 C2514.2 C2515.2 C2517.1 C2519.2 C2520.2 C2522.2 C2523.2 C2525.2 C2526.2 D11.A D12.A D13.A D14.A D22.2(CATHODE) D23.2(CATHODE) J2.A1_B12(P1) J2.B1_A12(P16) J2.G1(SH1) J2.G2(SH2) J2.G3(SH3) J2.G4(SH4) J7.4 J11.1(P1) J11.4(P4) J11.7(P7) J11.10(P10) J11.13(P13) J11.16(P16) J11.19(P19) J11.G1 J11.G2 J13.4(P4) J13.7(P7) J13.10(P10) J13.13(P13) J13.16(P16) J13.20(SH1) J13.21(SH2) J13.22(SH3) J13.23(SH4) J14.4(P4) J14.5(P5) J14.6(P6) J14.7(P7) J14.8(P8) J16.6(VSS) J16.10(SH1) J16.11(SH2) J16.12(SH3) J16.13(SH4) J17.3 J17.7(G1) J17.8(G2) J21.4 J21.7 J21.10 J21.13 J21.16 J21.19 J21.22 J21.23 J21.G1 J21.G2 J23.3 J24.1 J24.2 J24.7 J24.8 J24.13 J24.14 J24.22 J24.23 J24.32 J24.33 J24.42 J24.43 J24.52 J24.53 J24.59 J24.60 J24.65 J24.66 J24.71 J24.74 J24.98 J25.7 J25.8 J25.13 J25.14 J25.19 J25.20 J25.25 J25.26 J25.31 J25.32 J25.37 J25.38 J25.44 J25.50 J25.55 J25.56 J25.61 J25.62 J25.67 J25.68 J25.73 J25.74 J25.79 J25.80 J25.85 J25.86 J25.91 J25.92 J25.97 J25.98 J26.1(P1) J26.4(P4) J26.7(P7) J26.10(P10) J26.13(P13) J26.16(P16) J26.19(P19) J26.G1 J26.G2 J27.1 J28.1 J28.2 J28.7(G1) J28.8(G2) Q4.2(S) Q5.2(S) Q6.2(S) Q7.2(S) R87.1(A) R90.2(B) R91.2(B) R368.1(A) R371.1(A) R373.1(A) R3039.2 R3044.2 R3049.1 R3053.2 R3059.1 R3061.1 R3062.1 R3063.2(B) R3065.2 R3088.1(A) R3090.1(A) R3092.1(A) R3099.1(A) R3103.1(A) R3104.1(A) R3106.1(A) R3107.1(A) R3108.2(B) R3133.2 R3134.2 R3149.1(A) R3160.1 R3163.1(A) R3177.1 R3181.1 R3183.1 R3186.2(B) R3189.1(A) R3196.1 SW2.1 TP91.1(PIN1) TP99.1(PIN1) U3.12(DVSS1) U3.25(AVSS1) U3.33(AVSS2) U3.36(DVSS2) U5.2(GND) U6.4(GND) U12.7(GND) U18.15(VSS) U57.18(GND) U57.25(G) U60.2(GND) U501.2(GND1) U501.3(GND2) U580.5(GND) U597.15(AGND) U597.27(PGND1) U597.28(PGND2) U600.16(GND) U601.2(GND) U602.5(GND) U602.10(O\E\) Y2.2 Y2.4
VBAT: C2490.1 C2491.1 D18.2 J23.1 R3052.2(B) R3089.2(B) R3095.2(B) R3097.2(B) R3100.2(B) TP44.1(PIN1) U597.17(BAT)
VBAT_AD: C2525.1 R3052.1(A) R3053.1 R3154.1(A) U18.14(ADC_9)
VBAT_AD_C: J24.94 R3154.2(B)
VBUS: C68.1 C69.1 C85.2 C2484.1 C2485.1 C2486.1 C2495.1 C2496.1 F2.1(P1) FB2.1 FB8.2 FB9.2 FB10.1 FB13.2 L5.1 Q3.1(G) R124.1 R3086.1(A) R3101.1(A) R3137.1(A) R3168.2 R3169.2 TP30.1(PIN1) TP43.1(PIN1) U6.1(VIN) U597.3(SYS1) U597.20(SYS3) U597.29(SYS2) U600.13(VCC)
VBUSA: F2.2(P2) J14.1(P1) J28.5 J28.6 R3058.2 TP52.1(PIN1) U5.5(PW)
VDD_AMP: C20.1 FB2.2 TP57.1(PIN1) U12.6(VDD)
VDDA: C2474.1 C2479.1 FB7.2 U18.5(VDDA)
AMP_SHUTDOWN: J24.45 Q6.1(G) R3061.2 R3145.1 TP59.1(PIN1)
AU_IN: C2517.2 R127.1(A) R3184.2(B)
BL_EN: R88.2(B) R3197.1(A)
BOOST_EN: R3094.1 U18.11(SPI1_CLK) U597.24(MODE)
BT_NDIS: J24.91 TP78.1(PIN1)
CAM0_CN: J25.40 J26.8(P8)
CAM0_CP: J25.42 J26.9(P9)
CAM0_DN0: J25.28 J26.2(P2)
CAM0_DN1: J25.34 J26.5(P5)
CAM0_DP0: J25.30 J26.3(P3)
CAM0_DP1: J25.36 J26.6(P6)
CAM0_IO0: J24.27 J26.17(P17)
CAM0_IO1: J24.26 J26.18(P18)
CAM1_CN: J11.8(P8) J25.27
CAM1_CP: J11.9(P9) J25.29
CAM1_DN0: J11.2(P2) J25.15
CAM1_DN1: J11.5(P5) J25.21
CAM1_DN2: J11.11(P11) J25.33
CAM1_DN3: J11.14(P14) J25.39
CAM1_DP0: J11.3(P3) J25.17
CAM1_DP1: J11.6(P6) J25.23
CAM1_DP2: J11.12(P12) J25.35
CAM1_DP3: J11.15(P15) J25.41
CAM1_IO0: J11.17(P17) J24.34
CAM1_IO1: J11.18(P18) J24.54
CAM_GPIO: J24.97 TP79.1(PIN1)
CHARGE_EN: R3096.1 U18.12(SPI1_MISO) U597.25(EN)
CM_1V8: J21.3 J24.88 J24.90 R3057.1(A)
CM_3V3: C385.1 FB12.2 J11.22(P22) J21.1 J21.2 J24.84 J24.86 J26.22(P22) R15.2 R16.1 R17.1 R18.2 R370.1(A) R3157.1(A) R3165.2 R3166.2 R3167.1(A) U57.13(VDD)
CM_5V: C2505.1 FB10.2 J24.77 J24.79 J24.81 J24.83 J24.85 J24.87
DSI1_CN: J21.14 J25.87
DSI1_CP: J21.15 J25.89
DSI1_DN0: J21.11 J25.75
DSI1_DN1: J21.17 J25.81
DSI1_DN2: J21.20 J25.93
DSI1_DN3: J21.8 J25.94
DSI1_DP0: J21.12 J25.77
DSI1_DP1: J21.18 J25.83
DSI1_DP2: J21.21 J25.95
DSI1_DP3: J21.9 J25.96
E2P_CS: U3.4(CS) U580.1(CS)
E2P_DI: R3174.1(A) U580.4(DO)
E2P_DO: R3175.1(A) U580.3(DI)
E2P_SK: U3.3(SK) U580.2(SK)
EEPROM_WP: J24.20 TP84.1(PIN1)
GLOBAL_EN: J24.99 R3193.2(B) TP80.1(PIN1)
GPIO12: J24.31 R3197.2(B)
GPIO13: J24.28 Q7.1(G) R3196.2
GPIO14: J24.55 R3194.2(B)
GPIO15: J24.51 R3195.2(B)
GPIO16: J24.29 R3201.2(B)
GPIO25: J24.41 R3198.2(B)
GPIO_VEF(IN): J24.78 R3157.2(B)
GYRO_INT: J24.48 R3167.2(B) U57.12(INT)
HDMI1_SCL: J13.17(P17) J25.47 R3169.1
HDMI1_SDA: J13.18(P18) J25.45 R3168.1
HDMI_CEC: J25.49 Q3.2(S) R15.1
HDMI_CK_N: J13.14(P14) J25.66
HDMI_CK_P: J13.12(P12) J25.64
HDMI_D0_N: J13.11(P11) J25.60
HDMI_D0_P: J13.9(P9) J25.58
HDMI_D1_N: J13.8(P8) J25.54
HDMI_D1_P: J13.6(P6) J25.52
HDMI_D2_N: J13.5(P5) J25.48
HDMI_D2_P: J13.3(P3) J25.46
HDMI_HPD: J13.1(P1) Q4.1(G) R3062.2
HDMI_HPD_N: J25.43 Q4.3(D) R18.1
ID_SC: J24.35 TP90.1(PIN1)
ID_SD: J24.36 TP89.1(PIN1)
IN2SYS_EN: R3092.2(B) R3093.1(A) U18.13(SPI1_MOSI) U597.7(PWIN)
LCD_RST: J21.5 J24.30 R3057.2(B)
LED0: R3178.1 U3.11(LED0)
LEDR: R3179.1 U3.19(LEDR)
LOL: C2518.1 U3.30(LOL)
LOR: C2516.1 U3.32(LOR)
MCU_3V3: C2477.1 C2478.1 C2481.1 FB7.1 J7.1 R272.2 R3040.2 R3043.1 R3051.1 R3054.2 R3060.1 TP65.1(PIN1) TP98.1(PIN1) U18.16(VDD) U60.5(OUT)
MCU_IND: Q5.1(G) R3059.2 U18.9(ADC_3)
MCU_REV1: R3193.1(A) R3198.1(A) U18.6(PA0)
MCU_REV2: R3156.1(A) R3201.1(A) U18.7(PA1)
MCU_RST: C2523.1 R272.1 U18.4(NRST)
MICIN: R3199.1(A) R3200.1(A) U3.28(MICIN)
MODE: J24.40 R3176.1 R3177.2 U3.10(MODE)
MSEL: J24.50 R3182.1 R3183.2 U3.40(MSEL)
MUTEP: J24.49 U3.17(MUTEP)
MUTER: J24.37 U3.5(MUTER)
NRPIBOOT: J24.93 R3156.2(B)
OSC_IN: C2475.1 U18.2(OSC_IN) Y2.3
OSC_OUT: C2476.1 U18.3(OSC_OUT) Y2.1
PI_NLED_ACTIVITY: D1.2(CATHODE) J24.21
PWRSEL: J24.39 R3160.2 R3173.1 U3.6(PWRSEL)
REG1V8: C2515.1 U3.7(DREG18)
REG3V3: C2511.1 C2514.1 R3158.1(A) R3173.2 R3176.2 R3180.2 R3182.2 U3.8(DREG33) U580.8(VCC)
RUN_PG: J24.92 TP83.1(PIN1)
RXD0: R3041.1 R3195.1(A)
SCL0: J11.20(P20) J24.80 J26.20(P20) R16.2
SCL5: J24.38 R3165.1 U57.23(SCL)
SCL6: J24.47 R43.2(B)
SDA0: J11.21(P21) J24.82 J26.21(P21) R17.2
SDA5: J24.44 R3166.1 U57.24(SDA)
SDA6: J24.46 R42.2(B)
SDX_CLK: J24.57 R3141.1
SDX_CMD: J24.62 R3140.1
SDX_D0: J24.63 R3142.1
SDX_D1: J24.67 R3143.1
SDX_D2: J24.69 R3138.1
SDX_D3: J24.61 R3139.1
SDX_DET: J16.9(DET) J24.76 R3132.1
SEL: R3163.2(B) R3164.1(A) R3172.2(B) U602.2(SEL)
SWCLK: J7.3 R3044.1 TP63.1(PIN1) U18.20(SWCLK)
SWDIO: J7.2 R3043.2 TP62.1(PIN1) U18.19(SWDIO)
SWITCH: R3054.1 SW2.2 U18.10(SPI1_CS)
TEST: R3180.1 R3181.2 U3.20(TEST)
TOUCH_INT_B: J24.25 R120.2(B)
TP_RST: J24.24 R121.2(B)
TXD0: R3042.1 R3194.1(A)
USB1_DM: R122.1(A) U5.6(C21) U600.7(DM1)
USB1_DP: R123.1(A) U5.1(C11) U600.8(DP1)
USB2_DM: U3.44(USBDM) U600.5(DM2)
USB2_DP: U3.43(USBDP) U600.6(DP2)
USB3_DM: J28.4 U600.3(DM3)
USB3_DP: J28.3 U600.4(DP3)
USB5V_AD: C2526.1 R3064.1(A) R3065.1 R3155.1(A) U18.8(ADC_2)
USB5V_AD_C: J24.96 R3155.2(B)
USB_DN: J25.3 U602.4(D-)
USB_DP: J25.5 U602.3(D+)
USBH_DN: U600.10(DM) U602.8(HSD2-)
USBH_DP: U600.11(DP) U602.9(HSD2+)
USBOTG_ID: J25.1 Q7.3(D) R3172.1(A) TP94.1(PIN1)
USBS_DN: R3161.2(B) U601.4(C22) U602.6(HSD1-)
USBS_DP: R3162.2(B) U601.3(C12) U602.7(HSD1+)
VBIAS: R3190.1(A) U3.26(VBIAS)
VD33: C2497.1 C2512.1 U600.12(DCP) U600.14(V33)
VLED+: C76.1 C78.1 D10.C J21.29 J21.30 J21.31 TP33.1(PIN1)
VLED-: J21.25 J21.26 J21.27 R89.1(A) R90.1(A) R91.1(A) R3063.1(A)
VOLDN: J24.56 U3.47(VOLDN)
VOLUP: J24.58 U3.41(VOLUP)
WL_NDIS: J24.89 TP77.1(PIN1)
N1478133: D11.C J17.2 R42.1(A) R114.1
N1478157: D12.C J17.1 R43.1(A) R115.1
N1478281: C81.1 D14.C J17.4 R117.2 R121.1(A) TP28.1(PIN1)
N1478289: C82.1 D13.C J17.5 R118.2 R120.1(A) TP29.1(PIN1)
N12332208: J9.2 R125.1 TP60.1(PIN1) U12.5(VO1)
N12332215: J9.1 TP61.1(PIN1) U12.8(VO2)
N12333733: Q6.3(D) R124.2 U12.1(SD)
N12334307: C86.1 U12.2(BP) U12.3(IN+)
N12334479: R125.2 R126.1 U12.4(IN-)
N12334672: C87.2 R126.2
N12335205: C87.1 R127.2(B) TP58.1(PIN1)
N12373140: R368.2(B) U57.1(CLKIN)
N12374321: C383.1 R370.2(B) U57.8(VLOGIC)
N12375648: C384.1 U57.10(REGOUT)
N12375668: R371.2(B) U57.11(FSYNC)
N12378079: C386.2 U57.20(CPOUT)
N12396095: R3039.1 R3040.1 U18.1(BOOT0)
N12403489: R3042.2 U18.18(U1_RX)
N12403491: R3041.2 U18.17(U1_TX)
N12412618: C2480.1 D17.1 D18.1 TP64.1(PIN1) U60.1(IN) U60.3(EN)
N12412734: R3049.2 R3051.2 U60.4(FB)
N12455509: J13.15(P15) Q3.3(D)
N12499716: D19.2(CATHODE) Q5.3(D)
N12720539: D10.A L5.2 U6.3(SW)
N12720829: C73.1 R87.2(B) R88.1(A) R3066.2(B) U6.2(CTRL)
N12720857: R89.2(B) U6.6(FB)
N12720893: C74.1 U6.5(COMP)
N12836963: J13.19(P19) R3058.1
N12951060: J14.2(P2) R122.2(B) U5.4(C22)
N12951086: J14.3(P3) R123.2(B) U5.3(C12)
N12951166: R3086.2(B) R3088.2(B) U597.11(FB)
N12951176: C2483.2 R3087.1(A)
N12951178: R3087.2(B) U597.1(IB)
N12951234: L634.1 U597.2(SW1) U597.21(SW2)
N12951240: L634.2 R3089.1(A) U597.18(CSP)
N12951278: R3090.2(B) R3091.1(A) U597.9(REG)
N12951318: C2492.1 R3094.2 R3096.2 R3102.1(A) TP45.1(PIN1) U597.5(VCC)
N12951326: D20.2(CATHODE) U597.23(C\H\G\)
N12951328: D20.1(ANODE) R3095.1(A)
N12951350: R3097.1(A) U597.10(A\C\O\K\)
N12951358: R3098.2(B) R3101.2(B) R3103.2(B) R3137.2(B) U597.12(NTC)
N12951362: J23.2 R3098.1(A) TP47.1(PIN1)
N12951368: R3099.2(B) U597.26(FREQ)
N12951370: D21.2(CATHODE) U597.22(B\O\O\S\T\)
N12951372: D21.1(ANODE) R3100.1(A)
N12951392: R3102.2(B) R3104.2(B) U597.16(VB)
N12951398: C2493.1 U597.8(TMR)
N12951408: R3105.2(B) U597.6(ILIM)
N12951410: R3106.2(B) U597.13(ISET)
N12951412: R3107.2(B) U597.14(OLIM)
N12951420: R3105.1(A) R3108.1(A)
N12951470: F1.1(P1) J2.A4_B9(P3) J2.B4_A9(P14) TP41.1(PIN1)
N12951488: J2.A5(P6) R3133.1
N12951490: J2.B5(P12) R3134.1
N12951536: J16.1(DAT2) R3138.2
N12951538: J16.2(CD/DAT3) R3139.2
N12951540: J16.3(CMD) R3140.2
N12951542: J16.5(CLK) R3141.2
N12951544: J16.7(DAT0) R3142.2
N12951546: J16.8(DAT1) R3143.2
N13080452: R3174.2(B) U3.1(DR)
N13080482: FB13.1 U3.35(DVDD)
N13080512: C2503.1 C2504.1 FB8.1 U3.34(AVDD2)
N13080672: C2501.1 C2502.1 FB9.1 U3.29(AVDD1)
N13097468: C2507.1 U3.27(VREF)
N13098112: C2508.2 C2509.1 R3158.2(B) U501.1(VDD)
N13104223: C2510.1 C2524.2 U501.4(OUTPUT)
N13115240: D1.1(ANODE) R3.2
N13167489: J2.B8(P5) TP92.1(PIN1)
N13167505: J2.A8(P11) TP93.1(PIN1)
N13167521: J2.A6(P8) J2.B6(P10) R3162.1(A) U601.1(C11)
N13167621: J2.A7(P9) J2.B7(P7) R3161.1(A) U601.6(C21)
N13191587: R3149.2(B) U600.9(REF)
N13218298: R3175.2(B) U3.2(DW)
N13235636: TP95.1(PIN1) U3.42(PDSW)
N13236221: C2513.1 U3.39(AREG36)
N13242775: C2516.2 R3185.1(A)
N13242801: R3184.1(A) R3185.2(B) R3186.1(A)
N13245751: C2519.1 R3188.2(B) TP97.1(PIN1)
N13245789: R3187.2(B) R3188.1(A) R3189.2(B)
N13245825: C2518.2 R3187.1(A)
N13254228: C2520.1 R3190.2(B) R3192.1(A)
N13255610: C2521.2 R3191.1(A)
N13255658: C2522.1 J27.2 R3191.2(B) R3192.2(B)
N13279315: C2524.1 R3199.2(B)
N13279395: C2521.1 R3200.2(B)
N13284349: TP100.1(PIN1) U600.1(DM4)
N13284361: TP101.1(PIN1) U600.2(DP4)
N123465088: R373.2(B) U57.9(AD0)
N124996560: D19.1(ANODE) R3060.2
N132243780: D22.1(ANODE) R3178.2
N132252170: D23.1(ANODE) R3179.2
N1308043429: TP81.1(PIN1) U3.31(LOBS)

Pads without a net: J13 2; J21 6 24 28; J24 3 4 5 6 9 10 11 12 15 16 17 18 19 64 68 70 72 73 75 95 100; J25 2 4 6 9 10 11 12 16 18 22 24 51 53 57 59 63 65 69 70 71 72 76 78 82 84 88 90 99 100; J26 11 12 14 15; U3 9 13 14 15 16 18 21 22 23 24 37 38 45 46 48; U57 2 3 4 5 6 7 14 15 16 17 19 21 22; U580 6 7; U600 15

## Via types
v1: diameter 0.508, hole 0.254, TOP to BOTTOM, 1146 vias

## Routing (per net, layer and track width the routed paths; a pad name or vN(x,y) marks a point on that pad's centre or on a via; arc(x,y) is an arc through that point)
3V3: length 59
  TOP w0.254: v1(66.04,99.06) 65.66,99.44 65.66,99.95 65.41,100.2 64.39,100.2 64.11,100.49 R3145.2
  TOP w0.305: R3066.1 v1(43.85,17.02) ; R117.1 v1(73.66,62.36) ; R118.1 v1(73.79,57.66) ; C17.2 19.56,73.15 19.03,72.63 U602.1 ; R114.2 v1(73.66,65.02) ; v1(78.11,66.85) R115.2
  TOP w0.381: v1(51.94,72.14) 55.63,72.14 v1(63.37,79.88) R3.1 ; C17.2 v1(20.48,73.63)
  BOTTOM w0.381: v1(51.94,72.14) 21.97,72.14 v1(20.48,73.63)
  vias: v1(34.04,8.26) v1(35.05,8.26) v1(67.56,92.08) v1(68.2,91.31) v1(68.83,92.08) v1(80.77,56.13) v1(80.77,54.99) v1(81.92,56.13) v1(81.92,54.99)
3V3_SD: length 33.8
  TOP w0.381: R3132.2 v1(19.94,17.14) ; J16.4 20.39,5.15 22.23,6.99 27.31,6.99 v1(29.21,5.08) C24.1 30.51,5.05 R3153.2
  L03 w0.381: v1(19.94,17.14) 20.7,16.38 20.7,10.03 22.1,8.64 25.66,8.64 v1(29.21,5.08)
5V_IN: length 18.1
  TOP w0.305: R3091.2 v1(75.44,10.54) ; v1(72.42,9.14) R3093.2
  TOP w0.381: v1(14.99,73.66) 16.26,74.93 R3164.2 ; U601.5 v1(10.5,69.98)
  L03 w0.305: v1(66.58,4.36) 67.18,4.95 69.98,4.95 72.42,7.4 v1(72.42,9.14) 73.82,10.54 v1(75.44,10.54)
  vias: v1(13.08,60.33) v1(13.08,59.05) v1(13.84,59.69) v1(14.61,60.33) v1(14.61,59.05) v1(15.37,59.69) v1(64.55,4.36) v1(64.55,3.56) v1(65.57,4.36) v1(65.57,3.56) v1(66.58,3.56) v1(83.06,26.29) v1(83.06,25.15) v1(84.07,26.29) v1(84.07,25.15)
GND: length 598
  TOP w0.203: J24.7 v1(58.42,80.64) ; v1(55.24,81.92) 55.32,81.84 J24.14 ; J25.8 22.86,80.64 23.11,80.9 v1(23.11,81.03) ; J13.10 3.64,84.75 v1(3.56,84.84) ; J25.19 24.88,83.04 v1(24.38,82.55) ; J13.4 3.79,83.55 v1(3.68,83.44) ; v1(57.15,84.45) 57.15,84.96 56.67,85.44 J24.32 ; J25.26 21.12,84.24 v1(20.95,84.07) ; J25.73 25.92,93.84 26.29,93.47 v1(26.54,93.47) ; J25.85 v1(26.52,96.24) ; v1(57.15,89.53) 57.06,89.44 J24.52 ; J25.20 22.91,83.04 23.11,82.84 v1(23.11,82.55) ; J13.13 6.99,85.35 7.37,85.72 v1(7.49,85.72) ; J25.74 23,93.84 v1(23.24,93.6) ; v1(58.42,92.08) 58.59,92.24 J24.65 ; v1(21.08,97.28) 21.24,97.44 J25.92 ; v1(20.95,86.49) 21.11,86.64 J25.38 ; v1(24.38,84.96) 24.86,85.44 J25.31 ; J25.7 v1(24.38,80.64) ; J24.60 56.91,91.04 v1(57.15,90.81) ; v1(55.24,79.38) 55.31,79.44 J24.2 ; v1(60.96,90.81) 60.72,91.04 J24.59 ; J24.22 55.5,83.44 v1(55.24,83.19) ; J25.13 24.69,81.84 v1(24.38,81.53) ; v1(24.26,98.64) J25.97 ; v1(58.42,85.72) 58.54,85.84 J24.33 ; v1(7.49,84.07) 7.42,84.15 J13.7 ; J24.53 60.65,89.84 v1(60.96,89.53) ; J24.71 58.52,93.44 v1(58.42,93.34) ; J24.66 55.41,92.24 v1(55.24,92.08) ; v1(58.42,83.82) 58.67,83.82 58.7,83.84 J24.23 ; v1(60.96,81.92) 60.89,81.84 J24.13 ; J25.25 24.68,84.24 v1(24.38,83.95) ; v1(26.67,94.87) 26.5,95.04 J25.79 ; J25.98 21.25,98.64 v1(21.08,98.81) ; J25.61 v1(26.42,91.44) ; J25.37 24.86,86.64 v1(24.38,87.12) ; J25.56 v1(23.24,90.24) ; J24.42 56.7,87.44 v1(57.15,87) ; v1(23.5,95.25) 23.5,95.24 23.29,95.04 J25.80 ; J24.1 58.49,79.44 v1(58.42,79.38) ; J24.8 v1(55.25,80.64) ; J24.43 58.76,87.84 58.42,87.5 v1(58.42,87) ; v1(3.56,86.26) 3.91,86.26 4.22,85.95 J13.16 ; v1(23.24,88.14) 22.94,87.84 J25.44 ; v1(55.24,93.34) 55.74,93.84 J24.74 ; J25.32 21.11,85.44 v1(20.95,85.6) ; v1(26.42,90.42) 26.23,90.24 J25.55 ; J25.68 v1(23.18,92.64) ; U597.27 64.2,14.77 v1(63.91,14.48) 64.03,14.37 U597.28 ; J25.14 v1(21.46,81.84) ; J25.50 v1(23.24,89.04) ; U57.18 71.51,87.85 v1(71.74,87.63) ; J25.91 v1(24.29,97.44) ; J25.67 v1(26.49,92.64) ; v1(23.5,96.01) 23.27,96.24 J25.86 ; J25.62 v1(23.24,91.44) ; J24.98 56.93,98.64 v1(57.15,98.42)
  TOP w0.254: 11.39,72.05 R3133.2 10.91,72.54 ; C2492.2 72.17,6.35 ; C2492.2 71.69,5.87 ; C2492.2 71.69,6.83 ; 44.76,16.29 R87.1 ; R87.1 45.25,16.77 ; R87.1 45.73,16.29 ; 15.37,77.47 R3196.1 15.85,77.95 ; 4.98,14.11 C2509.2 ; C2509.2 5.94,14.11 ; C2509.2 5.46,13.63 ; 74.45,8.66 R3092.1 74.93,9.14 ; v1(87,42.2) J21.G2 88.02,42.2 v1(89.03,42.2) ; R3108.2 74.93,7.75 ; R3108.2 74.45,7.26 ; R3108.2 74.45,8.23 ; U3.12 v1(29.35,35.19) ; U602.10 19.03,65.8 v1(19.05,65.79) ; v1(63.91,14.48) v1(63.15,14.48) ; U3.33 33.35,29.03 v1(33.78,29.46) ; v1(69.24,17.27) U597.15 68.11,17.66 68.51,18.06 v1(68.51,18.21) ; 27.81,53.98 R3149.1 28.3,53.5 ; 6.25,14.11 C2508.1 6.73,13.63 ; U3.36 v1(34.85,29.41) ; U3.25 v1(29.35,29.2) ; v1(84.58,61.25) J17.3
  TOP w0.305: v1(63.99,32.89) 63.74,33.14 C2474.2 ; J26.13 73.27,110.22 v1(73.28,110.24) ; v1(68.77,110.24) 68.77,110.24 J26.4 ; R3104.1 v1(72.93,20.48) ; C2520.2 v1(12.32,22.99) ; v1(83.47,82.7) 83.52,82.75 J11.4 ; C2501.2 v1(28.19,23.88) ; J11.16 v1(83.57,76.75) ; J21.16 84.63,37 84.23,36.61 v1(84.23,36.2) ; J11.1 83.52,84.25 v1(83.47,84.2) ; v1(84.45,39.12) 84.77,38.8 J21.10 ; R3049.1 68.36,48.5 v1(68.72,48.13) ; v1(72.44,10.44) 72.34,10.54 C2493.2 ; v1(78.11,60.96) 78.15,61.01 D14.A ; v1(84.23,34.67) 84.77,35.2 85.41,35.2 J21.22 ; C2514.2 v1(29.34,40.77) ; R3134.2 v1(11.77,63.67) ; D12.A v1(78.11,65.07) ; C82.2 v1(73.66,59.18) ; C2504.2 v1(36.71,22.86) ; v1(61.61,41.14) 62.05,41.58 U18.15 ; R3039.2 v1(55.93,37.3) ; C2495.2 v1(27.81,49.28) ; D13.A v1(78.11,58.97) ; v1(66.31,43.31) R3053.2 ; J11.10 83.52,79.75 v1(83.47,79.7) ; R3183.1 41.15,29.97 v1(41.27,29.84) ; v1(89.15,37.97) 89.08,37.9 J21.13 ; v1(17.27,70.23) 17.03,70.47 U602.5 ; C2476.2 v1(61.23,33.65) 61.47,33.65 61.85,33.27 61.85,32.51 61.98,32.38 v1(61.98,30.99) 61.98,30.98 61.68,30.67 Y2.4 60.84,29.9 60.53,29.59 v1(60.45,29.59) v1(58.93,29.59) 57.71,29.59 v1(57.33,29.97) v1(57.33,30.99) v1(57.33,32.27) 57.63,32.57 Y2.2 58.54,33.41 58.12,33.83 C2475.2 v1(57.39,34.41) ; v1(89.03,31.75) 88.98,31.8 J21.G1 ; J11.7 83.52,81.25 v1(83.47,81.2) ; v1(13.21,88.01) 13.07,87.88 Q4.2 ; R373.1 v1(78.23,86.61) ; v1(25.02,25.27) C2507.2 ; v1(63.14,48.51) 63.14,48.25 C2478.2 64.41,48.51 v1(64.53,48.51) 64.53,48.51 C2481.2 65.93,48.38 v1(66.18,48.38) ; v1(31.37,6.6) C24.2 v1(29.46,6.6) ; J21.4 84.8,40.6 v1(84.45,40.26) ; R3177.1 v1(28.07,40.77) ; R3160.1 v1(33.15,40.77) ; R3186.2 v1(36.83,20.32) ; C2515.2 v1(31.88,40.77) ; D11.A v1(78.11,63.04) ; v1(89.15,36.1) 89.15,36.1 J21.19 ; R3065.2 v1(66.31,38.73) ; J21.7 88.95,39.7 v1(89.15,39.5) ; R3044.2 52.48,52.68 52.35,52.81 J7.4 52.35,61.9 TP99.1 ; v1(83.57,75.18) 83.63,75.25 J11.19 ; C384.2 v1(78.23,87.88) ; v1(89.15,34.9) 89.15,34.9 J21.23 ; v1(71.75,110.24) 71.77,110.22 J26.10 ; v1(67.56,38.73) C2526.2 ; C2503.2 v1(36.45,25.27) ; J11.13 83.62,78.25 v1(83.6,78.23) ; C81.2 v1(73.66,60.83) ; v1(66.28,35.43) R3059.1 66.77,36.8 66.98,36.58 Q5.2 ; R3181.1 v1(23.62,30.86) ; R371.1 v1(78.23,89.15) ; R3090.1 v1(75.44,11.94) ; R3103.1 v1(72.17,14.1) 72.17,13.81 R3088.1 ; R3107.1 v1(72.42,18.29) ; R3062.1 v1(9.88,90.07) ; J26.7 v1(70.27,110.24) ; J26.16 v1(74.77,110.24) ; J26.1 v1(67.27,110.24) ; C2502.2 v1(28.96,25.4) ; C80.2 v1(78.11,57.15) ; C386.1 v1(69.72,86.58) ; C17.1 v1(19.56,75.31) ; C2525.2 v1(67.56,43.31) ; C2477.2 61.99,48.12 v1(61.98,48.13) ; D22.2 v1(25.27,37.47) ; C385.2 v1(72.52,90.17) ; C2479.2 v1(65.01,32.89) 64.55,32.43 C2523.2 ; R368.1 v1(73.15,82.93) ; J26.19 v1(76.27,110.24) ; R3106.1 v1(72.42,16.89) ; C2517.1 v1(37.59,18.92) ; C383.2 v1(78.23,85.34) ; C2511.2 v1(30.61,40.77)
  TOP w0.381: J2.B1_A12 6.67,64.05 6.29,63.67 J2.G2 ; C2519.2 30.48,19.05 v1(30.48,20.32) R3189.1 ; R3044.2 v1(53.34,51.82) ; U5.2 16.13,49.15 ; 16.13,49.15 15.68,49.59 v1(15.68,49.75) ; 16.13,49.15 16.51,49.53 v1(16.51,49.78) ; C2512.2 v1(27.81,44.2) 28.32,43.69 U600.16 ; U601.2 v1(10.5,65.75) ; v1(8.21,16.55) C2510.2 v1(7.11,17.52) ; R3163.1 v1(16.51,73.66) ; J2.A1_B12 v1(7.87,71.19) ; TP91.1 77.63,12.1 J23.3
  TOP w0.4: U501.3 1.85,16.55 ; U501.3 1.22,17.18 ; U501.3 1.22,15.92 ; 1.22,14.22 U501.2 ; U501.2 1.85,14.85 ; U501.2 1.22,15.48
  TOP w0.405: 6.48,21.88 C2522.2 ; C2522.2 7.75,21.88 ; C2522.2 7.11,22.49 ; 79.41,56.51 C80.2 79.41,57.79 ; 47.38,13.84 C73.2 46.77,14.48 ; 30.86,11.08 C68.2 ; C68.2 31.5,11.69 ; C68.2 30.23,11.69 ; R90.2 52.87,14.96 ; R90.2 52.23,14.35 ; R90.2 53.5,14.35 ; 68.87,97.69 C86.2 ; C86.2 68.87,98.91 ; C86.2 68.28,98.3 ; C2513.2 41.76,28.57 ; C2513.2 41.15,27.94 ; C2513.2 41.15,29.21 ; R91.2 51.85,14.35 ; R91.2 50.58,14.35 ; R91.2 51.21,14.96 ; 82.2,35.6 R3063.2 82.84,36.21 ; 74.68,61.47 C81.2 74.68,60.2 ; 74.68,58.55 C82.2 74.68,59.82
  TOP w0.474: 21.04,31.68 D23.2 ; D23.2 21.04,33.09 ; D23.2 20.37,32.38
  TOP w0.477: 46.77,9.82 U6.4 47.69,10.35
  TOP w0.508: J14.5 10.32,53.32 v1(10.32,52.07) ; U580.5 v1(42.8,36.45) ; v1(68.72,46.86) 68.85,46.73 U60.2 v1(71.25,46.73) 71.39,46.73 71.49,46.63 C2480.2
  TOP w0.61: 31.9,11.32 C69.2 ; C69.2 32.77,10.58 ; C69.2 33.63,11.32 ; 23.31,48.01 C2496.2 24.02,47.17 ; C2486.2 60.5,10.77 ; C2486.2 59.76,9.91 ; C2486.2 60.5,9.04 ; 79.49,24.03 C2490.2 ; C2490.2 80.22,24.89 ; C2490.2 79.49,25.76 ; C2491.2 79.49,23.6 ; C2491.2 79.49,21.87 ; C2491.2 80.22,22.73 ; 60.5,7.01 C2485.2 ; C2485.2 59.76,7.87 ; C2485.2 60.5,8.74 ; 51.2,9.93 C74.2 51.93,10.79 ; 50.8,7.45 C78.2 49.94,6.71 ; 23.31,45.59 C2497.2 24.02,46.43
  TOP w0.635: C85.1 35.81,11.19 ; C85.1 34.24,10.16 ; C85.1 37.39,10.16 ; C85.1 35.81,9.13 ; C76.2 49.36,7.37 ; C76.2 47.79,8.4 ; C76.2 46.21,7.37 ; J16.13 22.5,15.71 ; J16.13 23.38,14.78 ; J16.13 21.62,14.78 ; J16.13 22.5,13.85 ; 65.51,94.75 C2505.2 ; C2505.2 65.51,96.76 ; C2505.2 66.32,95.76 ; J14.7 4.44,55.45 ; J14.7 2.91,56.68 ; J14.7 1.38,55.45 ; C20.2 77.99,104.15 ; C20.2 77.15,103.12 ; C20.2 77.99,102.1 ; C20.2 78.83,103.12 ; 18.35,60.48 C2.2 ; C2.2 17.51,61.51 ; C2.2 18.35,62.54 ; C2484.2 59.49,6.62 ; C2484.2 60.33,5.59 ; C2484.2 59.49,4.56 ; C2484.2 58.65,5.59 ; 85.51,63.95 J17.8 ; J17.8 87.97,63.95 ; J17.8 86.74,63.33 ; J17.8 86.74,64.58 ; 1.38,39.45 J14.8 ; J14.8 2.91,38.22 ; J14.8 4.44,39.45 ; 12.5,54 J14.5 11,55.5 ; 16.13,1.63 J16.11 14.27,1.63 ; 15.92,14.78 J16.12 16.8,13.85 ; 85.51,58.05 J17.7 ; J17.7 86.74,58.68 ; J17.7 86.74,57.43 ; J17.7 87.97,58.05
  TOP w0.64: J26.G1 80.1,112.38 ; J26.G1 78.84,112.38 ; J26.G1 79.47,113.6 ; J26.G1 79.47,111.15 ; J11.G2 88.81,85.95 ; J11.G2 87.58,86.58 ; J11.G2 87.58,85.32 ; J11.G2 86.36,85.95 ; 87.58,71.42 J11.G1 ; J11.G1 88.81,72.05 ; J11.G1 87.58,72.68 ; J11.G1 86.36,72.05 ; 64.94,112.38 J26.G2 ; J26.G2 65.57,113.6 ; J26.G2 65.57,111.15 ; J26.G2 66.2,112.38 ; 41.66,49.81 J28.8 ; J28.8 44.07,49.81 ; J28.8 42.86,49.21 ; J28.8 42.86,50.42 ; J28.7 42.86,44.52 ; J28.7 44.07,43.91 ; J28.7 41.66,43.91
  TOP w0.787: J13.21 4.72,88.83 ; J13.21 6.23,87.85 ; J13.21 3.22,87.85 ; 1.93,62.94 J2.G4 ; J2.G4 1.93,64.4 ; J2.G4 2.96,63.67 ; J13.22 6.23,81.65 ; J13.22 4.72,80.67 ; J13.22 3.22,81.65 ; J13.23 1.36,88.83 ; J13.23 2.87,87.85 ; J13.23 1.36,86.87 ; 11,39.4 J14.6 ; J14.6 12.5,40.9 ; J14.6 11,42.4 ; J13.20 2.87,81.65 ; J13.20 1.36,80.67 ; J13.20 1.36,82.63 ; 6.11,73.04 J2.G1 4.83,72.31 ; 12.1,42.96 J14.4 ; J14.4 12.1,44.94 ; J14.4 11.11,43.95 ; J14.4 13.09,43.95 ; J2.G3 1.93,73.04 ; J2.G3 1.93,71.58 ; J2.G3 2.96,72.31 ; SW2.1 4.45,97.93 ; SW2.1 5.28,97 ; SW2.1 3.62,97 ; SW2.1 4.45,96.07
  GND02 w0.635: J14.5 12.47,54 ; J14.5 11,52.53 ; J14.5 11,55.47
  GND02 w0.813: SW2.1 5.25,97 ; SW2.1 3.65,97 ; SW2.1 4.45,96.1 ; SW2.1 4.45,97.9 ; J14.6 11,42.37 ; J14.6 11,39.43 ; J14.6 12.47,40.9 ; 12.1,42.98 J14.4 ; J14.4 13.07,43.95 ; J14.4 11.13,43.95 ; J14.4 12.1,44.92 ; 1.93,62.97 J2.G4 ; J2.G4 1.93,64.37 ; J2.G4 0.93,63.67 ; J2.G4 2.93,63.67 ; J2.G3 1.93,73.01 ; J2.G3 1.93,71.61 ; J2.G3 0.93,72.31 ; J2.G3 2.93,72.31 ; 4.86,63.67 J2.G2 ; J2.G2 7.36,63.67 ; J2.G2 6.11,62.97 ; J13.23 2.84,87.85 ; J13.23 1.36,88.8 ; J13.23 1.36,86.9 ; 1.36,80.7 J13.20 ; J13.20 1.36,82.6 ; J13.20 2.84,81.65 ; J13.22 4.72,82.6 ; J13.22 6.2,81.65 ; J13.22 4.72,80.7 ; J13.22 3.25,81.65 ; J2.G1 6.11,73.01 ; J2.G1 7.36,72.31 ; J2.G1 4.86,72.31 ; 4.72,86.9 J13.21 ; J13.21 3.25,87.85 ; J13.21 4.72,88.8 ; J13.21 6.2,87.85
  L03 w0.635: 11,55.47 J14.5 11,52.53
  L03 w0.78: J2.G3 2.93,72.31 ; J2.G3 0.93,72.31 ; J2.G3 1.93,71.61 ; J2.G3 1.93,73.01 ; 3.25,87.85 J13.21 4.72,88.8 ; 12.1,42.98 J14.4 ; J14.4 11.13,43.95 ; J14.4 13.07,43.95 ; J14.4 12.1,44.92 ; J2.G1 6.11,73.01 ; J2.G1 4.86,72.31 ; J2.G1 7.36,72.31 ; J14.6 12.47,40.9 ; J14.6 11,39.43 ; J14.6 11,42.37 ; 1.36,80.7 J13.20 ; J13.20 2.84,81.65 ; J13.20 1.36,82.6 ; J13.22 4.72,82.6 ; J13.22 6.2,81.65 ; J13.22 3.25,81.65 ; J13.22 4.72,80.7 ; SW2.1 5.25,97 ; SW2.1 4.45,96.1 ; SW2.1 3.65,97 ; SW2.1 4.45,97.9 ; 1.93,62.97 J2.G4 ; J2.G4 1.93,64.37 ; J2.G4 2.93,63.67 ; J2.G4 0.93,63.67 ; 4.86,63.67 J2.G2 ; J2.G2 7.36,63.67 ; J2.G2 6.11,62.97 ; 1.36,86.9 J13.23 ; J13.23 1.36,88.8 ; J13.23 2.84,87.85
  L04 w0.635: 11,52.53 J14.5 ; J14.5 11,55.47 ; J14.5 12.47,54
  L04 w0.78: 1.36,80.7 J13.20 ; J13.20 1.36,82.6 ; J13.20 2.84,81.65 ; 3.65,97 SW2.1 ; SW2.1 4.45,96.1 ; SW2.1 5.25,97 ; SW2.1 4.45,97.9 ; 12.1,42.98 J14.4 ; J14.4 12.1,44.92 ; J14.4 13.07,43.95 ; J14.4 11.13,43.95 ; J2.G2 7.36,63.67 ; J2.G2 6.11,62.97 ; J2.G2 4.86,63.67 ; 4.72,80.7 J13.22 ; J13.22 6.2,81.65 ; J13.22 4.72,82.6 ; J13.22 3.25,81.65 ; 0.93,72.31 J2.G3 ; J2.G3 1.93,73.01 ; J2.G3 1.93,71.61 ; J2.G3 2.93,72.31 ; J2.G1 6.11,73.01 ; J2.G1 4.86,72.31 ; J2.G1 7.36,72.31 ; J14.6 11,42.37 ; J14.6 11,39.43 ; J14.6 12.47,40.9 ; J13.23 1.36,88.8 ; J13.23 2.84,87.85 ; J13.23 1.36,86.9 ; J13.21 6.2,87.85 ; J13.21 4.72,88.8 ; J13.21 3.25,87.85 ; 1.93,62.97 J2.G4 ; J2.G4 0.93,63.67 ; J2.G4 1.93,64.37 ; J2.G4 2.93,63.67
  GND05 w0.635: J14.5 11,55.47 ; J14.5 12.47,54 ; J14.5 11,52.53
  GND05 w0.813: J2.G3 1.93,73.01 ; J2.G3 1.93,71.61 ; J2.G3 2.93,72.31 ; J2.G3 0.93,72.31 ; 4.45,96.1 SW2.1 ; SW2.1 5.25,97 ; SW2.1 4.45,97.9 ; SW2.1 3.65,97 ; 4.86,63.67 J2.G2 ; J2.G2 6.11,62.97 ; J2.G2 7.36,63.67 ; J13.22 4.72,82.6 ; J13.22 6.2,81.65 ; J13.22 4.72,80.7 ; J13.22 3.25,81.65 ; 12.1,42.98 J14.4 ; J14.4 13.07,43.95 ; J14.4 11.13,43.95 ; J14.4 12.1,44.92 ; 4.86,72.31 J2.G1 ; J2.G1 7.36,72.31 ; J2.G1 6.11,73.01 ; J13.20 1.36,82.6 ; J13.20 1.36,80.7 ; J13.20 2.84,81.65 ; 1.93,62.97 J2.G4 ; J2.G4 1.93,64.37 ; J2.G4 0.93,63.67 ; J2.G4 2.93,63.67 ; 4.72,86.9 J13.21 ; J13.21 4.72,88.8 ; J13.21 6.2,87.85 ; J13.21 3.25,87.85 ; 11,39.43 J14.6 ; J14.6 12.47,40.9 ; J14.6 11,42.37 ; J13.23 2.84,87.85 ; J13.23 1.36,86.9 ; J13.23 1.36,88.8
  BOTTOM w0.635: J14.5 11,55.5 ; J14.5 11,52.5 ; J14.5 12.5,54
  BOTTOM w0.787: 1.93,62.94 J2.G4 ; J2.G4 1.93,64.4 ; J2.G4 2.96,63.67 ; 4.72,86.87 J13.21 ; J13.21 3.22,87.85 ; J13.21 6.23,87.85 ; J13.21 4.72,88.83 ; 11,39.4 J14.6 ; J14.6 11,42.4 ; J14.6 12.5,40.9 ; J2.G3 1.93,73.04 ; J2.G3 2.96,72.31 ; J2.G3 1.93,71.58 ; 11.11,43.95 J14.4 ; J14.4 13.09,43.95 ; J14.4 12.1,44.94 ; J14.4 12.1,42.96 ; J13.23 2.87,87.85 ; J13.23 1.36,88.83 ; J13.23 1.36,86.87 ; 4.72,80.67 J13.22 ; J13.22 4.72,82.63 ; J13.22 6.23,81.65 ; J13.22 3.22,81.65 ; SW2.1 5.28,97 ; SW2.1 4.45,97.93 ; SW2.1 4.45,96.07 ; SW2.1 3.62,97 ; 1.36,80.67 J13.20 ; J13.20 2.87,81.65 ; J13.20 1.36,82.63 ; J2.G1 7.39,72.31 ; J2.G1 4.83,72.31 ; J2.G1 6.11,73.04 ; 4.83,63.67 J2.G2 ; J2.G2 6.11,62.94 ; J2.G2 7.39,63.67
  vias: v1(0.89,61.59) v1(0.89,59.69) v1(0.89,57.78) v1(0.89,55.88) v1(1.14,17.73) v1(1.27,90.17) v1(1.27,11.43) v1(1.43,86.36) v1(1.43,83.82) v1(1.43,80.01) v1(1.43,77.47) v1(1.43,74.93) v1(1.43,71.12) v1(1.43,68.58) v1(1.43,66.04) v1(1.43,36.83) v1(1.43,34.29) v1(1.43,31.75) v1(1.43,29.21) v1(1.43,26.67) v1(1.43,13.97) v1(1.43,8.89) v1(2.54,61.59) v1(2.54,59.69) v1(2.54,57.78) v1(2.79,70.1) v1(2.79,67.44) v1(3.05,65.41) v1(3.17,99.06) v1(3.17,17.78) v1(3.81,106.68) v1(3.81,104.14) v1(3.81,95.25) v1(3.81,92.71) v1(3.81,90.17) v1(3.94,31.75) v1(3.94,26.67) v1(3.94,24.77) v1(3.94,22.99) v1(3.97,80.01) v1(3.97,77.47) v1(3.97,74.93) v1(3.97,71.12) v1(3.97,36.83) v1(3.97,34.29) v1(3.97,29.21) v1(3.97,13.97) v1(3.97,8.89) v1(4.45,61.59) v1(4.45,59.69) v1(4.45,57.78) v1(4.45,19.05) v1(4.45,17.78) v1(5.08,100.33) v1(5.46,69.47) v1(5.46,67.7) v1(5.84,90.17) v1(6.35,106.68) v1(6.35,104.14) v1(6.35,97.79) v1(6.35,95.25) v1(6.35,92.71) v1(6.35,61.59) v1(6.35,59.69) v1(6.35,57.78) v1(6.35,55.88) v1(6.35,19.05) v1(6.51,80.01) v1(6.51,77.47) v1(6.51,74.93) v1(6.51,39.37) v1(6.51,36.83) v1(6.51,34.29) v1(6.48,31.75) v1(6.51,29.21) v1(6.48,26.67) v1(6.48,24.77) v1(6.48,22.99) v1(6.51,11.43) v1(6.51,8.89) v1(7.49,82.68) v1(7.62,74.3) v1(8.26,97.79) v1(8.26,95.25) v1(8.26,92.71) v1(8.26,59.69) v1(8.26,57.78) v1(8.26,55.88) v1(8.76,68.46) v1(8.76,66.81) v1(8.89,113.79) v1(8.89,111.76) v1(8.89,109.22) v1(8.89,106.68) v1(8.89,104.14) v1(8.89,19.05) v1(8.89,17.14) v1(8.89,15.24) v1(9.05,74.93) v1(9.05,39.37) v1(9.05,36.83) v1(9.05,34.29) v1(9.05,31.75) v1(9.05,29.21) v1(9.05,26.67) v1(9.05,24.77) v1(9.05,22.99) v1(9.05,11.43) v1(9.05,6.35) v1(9.05,3.81) v1(9.05,1.27) v1(10.16,59.69) v1(10.16,57.78) v1(10.16,55.88) v1(10.16,43.05) v1(10.32,49.53) v1(10.32,46.99) v1(10.32,44.45) v1(10.79,19.05) v1(10.79,17.14) v1(10.79,15.24) v1(11.43,113.79) v1(11.43,111.76) v1(11.43,109.22) v1(11.43,106.68) v1(11.43,104.14) v1(11.43,97.79) v1(11.43,95.25) v1(11.43,92.71) v1(11.43,74.93) v1(11.43,11.43) v1(11.59,36.7) v1(11.59,34.16) v1(11.56,31.62) v1(11.59,29.08) v1(11.56,26.54) v1(11.56,24.64) v1(11.59,8.89) v1(11.59,6.35) v1(11.59,3.81) v1(11.59,1.27) v1(12.06,73.66) v1(12.06,72.39) v1(12.06,57.78) v1(12.06,55.88) v1(12.7,19.05) v1(12.7,17.14) v1(12.7,15.24) v1(13.34,72.39) v1(13.34,11.43) v1(13.34,8.89) v1(13.5,6.35) v1(13.5,3.81) v1(13.5,1.27) v1(13.59,45.59) v1(13.97,113.79) v1(13.97,111.76) v1(13.97,109.22) v1(13.97,106.68) v1(13.97,43.81) v1(13.97,41.91) v1(13.97,39.37) v1(14.13,36.7) v1(14.13,34.16) v1(14.13,31.62) v1(14.13,29.08) v1(14.13,26.54) v1(14.13,24.64) v1(14.48,45.59) v1(15.24,77.09) v1(15.88,88.14) v1(15.88,12.7) v1(16.51,113.79) v1(16.51,111.76) v1(16.51,109.22) v1(16.51,77.09) v1(16.64,96.01) v1(16.64,94.61) v1(16.64,93.22) v1(16.64,2.54) v1(16.67,1.27) v1(17.53,88.14) v1(17.78,79.38) v1(17.78,12.7) v1(17.78,10.79) v1(17.91,86.61) v1(17.91,82.93) v1(17.91,2.54) v1(17.94,1.27) v1(18.03,94.61) v1(18.16,93.22) v1(18.16,91.57) v1(18.29,59.82) v1(18.29,58.55) v1(18.41,63.25) v1(18.8,88.9) v1(18.92,83.95) v1(19.05,113.79) v1(19.05,111.76) v1(19.05,109.22) v1(19.18,1.27) v1(19.43,86.61) v1(19.68,14.61) v1(19.68,12.7) v1(19.68,10.79) v1(19.94,6.99) v1(20.19,90.42) v1(20.32,40.01) v1(20.32,38.1) v1(20.32,36.2) v1(20.32,34.29) v1(20.32,31.11) v1(20.32,29.34) v1(20.32,27.94) v1(20.83,75.56) v1(20.83,7.75) v1(20.95,71.75) v1(21.59,12.7) v1(21.59,10.79) v1(22.23,73.66) v1(22.23,66.67) v1(22.61,48.26) v1(22.61,46.99) v1(22.61,45.47) v1(22.86,77.47) v1(23.24,84.84) v1(23.24,83.95) v1(23.5,12.7) v1(23.5,10.79) v1(24.13,76.2) v1(24.64,4.45) v1(25.4,78.11) v1(25.4,69.22) v1(25.4,66.67) v1(25.4,10.79) v1(25.53,3.81) v1(27.3,81.28) v1(27.3,79.38) v1(27.3,10.79) v1(27.43,98.55) v1(27.43,97.66) v1(27.94,75.56) v1(27.94,60.33) v1(27.94,58.42) v1(27.94,56.52) v1(27.94,54.61) v1(28.32,96.14) v1(28.57,78.11) v1(29.21,113.79) v1(29.21,111.76) v1(29.21,109.22) v1(29.21,74.3) v1(29.21,10.79) v1(29.84,76.83) v1(29.84,0.76) v1(29.97,95.25) v1(29.97,93.22) v1(30.86,91.82) v1(30.86,90.3) v1(30.99,97.57) v1(30.99,96.18) v1(31.75,113.79) v1(31.75,111.76) v1(31.75,109.22) v1(31.75,0.76) v1(33.66,0.76) v1(34.29,113.79) v1(34.29,111.76) v1(34.29,109.22) v1(34.42,95.5) v1(34.42,91.19) v1(34.42,86.23) v1(34.42,81.66) v1(34.54,93.34) v1(34.54,89.41) v1(34.54,87.88) v1(34.54,84.71) v1(34.54,83.19) v1(34.92,80.64) v1(35.56,0.76) v1(35.94,94.61) v1(35.94,64.39) v1(35.94,60.58) v1(35.94,57.4) v1(36.07,92.08) v1(36.2,89.92) v1(36.2,84.71) v1(36.2,83.06) v1(36.45,87.88) v1(36.45,86.36) v1(36.7,6.1) v1(36.83,113.79) v1(36.83,111.76) v1(36.83,109.22) v1(36.83,55.24) v1(36.86,3.68) v1(37.47,95.25) v1(37.47,92.71) v1(37.47,7.62) v1(37.59,59.69) v1(37.85,4.83) v1(38.1,68.58) v1(38.1,57.28) v1(38.1,0.76) v1(38.35,106.81) v1(38.73,53.85) v1(39.24,3.81) v1(39.37,63.5) v1(39.37,60.96) v1(39.37,5.71) v1(40.01,95.25) v1(40.01,92.71) v1(40.01,66.67) v1(40.64,58.42) v1(40.64,56.01) v1(40.64,0.76) v1(41.27,50.04) v1(41.27,48.9) v1(41.27,47.62) v1(41.27,46.35) v1(41.27,45.09) v1(41.27,43.81) v1(41.27,27.3) v1(41.27,5.71) v1(41.91,64.77) v1(41.91,60.96) v1(42.29,106.81) v1(42.55,97.79) v1(42.55,95.25) v1(42.55,92.71) v1(42.55,90.17) v1(42.55,87.63) v1(42.55,29.84) v1(42.55,28.57) v1(42.55,27.3) v1(42.55,0.76) v1(43.18,59.69) v1(43.18,18.41) v1(43.81,48.9) v1(43.81,47.62) v1(43.81,46.35) v1(43.81,45.09) v1(44.45,97.79) v1(44.45,95.25) v1(44.45,92.71) v1(44.45,90.17) v1(44.45,71.25) v1(44.45,29.84) v1(44.45,28.57) v1(44.45,27.3) v1(44.45,18.41) v1(44.45,0.76) v1(46.35,69.85) v1(46.35,29.84) v1(46.35,28.57) v1(46.35,27.3) v1(46.35,18.41) v1(46.35,16.51) v1(46.35,15.24) v1(46.39,9.02) v1(46.35,0.76) v1(46.74,106.68) v1(46.99,97.79) v1(46.99,95.25) v1(46.99,92.71) v1(46.99,83.82) v1(46.99,81.28) v1(47.4,9.02) v1(47.62,18.41) v1(47.62,16.51) v1(47.62,15.24) v1(48.04,10.03) v1(48.26,67.94) v1(48.26,29.84) v1(48.26,28.57) v1(48.26,27.3) v1(48.67,9.02) v1(48.9,18.41) v1(48.9,16.51) v1(48.9,15.24) v1(48.9,13.97) v1(48.9,0.76) v1(49.53,95.25) v1(49.53,85.09) v1(49.53,82.55) v1(49.53,80.01) v1(49.53,66.67) v1(49.94,9.02) v1(49.94,7.87) v1(50.16,18.41) v1(50.16,16.51) v1(50.16,15.24) v1(50.16,13.97) v1(51.21,9.02) v1(51.21,7.87) v1(51.44,29.84) v1(51.44,28.57) v1(51.44,0.76) v1(52.2,106.68) v1(52.48,10.29) v1(52.48,9.02) v1(52.48,7.87) v1(53.34,43.18) v1(53.34,0.76) v1(53.72,29.84) v1(53.75,15.24) v1(53.75,14.1) v1(53.75,10.29) v1(53.75,9.02) v1(53.75,7.87) v1(53.98,50.8) v1(54.1,35.43) v1(54.61,66.04) v1(54.61,49.53) v1(55.02,15.24) v1(55.02,14.1) v1(55.24,0.76) v1(55.88,58.42) v1(55.88,55.88) v1(56.9,57.28) v1(57.02,106.68) v1(57.15,0.76) v1(57.66,66.93) v1(57.82,15.75) v1(57.82,14.61) v1(57.82,13.21) v1(57.82,11.68) v1(57.82,10.03) v1(57.82,8.38) v1(57.82,7.37) v1(57.95,4.23) v1(57.95,3.43) v1(58.42,58.42) v1(58.42,55.88) v1(58.42,54.48) v1(58.83,4.23) v1(58.83,3.43) v1(59.22,14.1) v1(59.22,10.03) v1(59.22,8.38) v1(59.22,7.37) v1(59.34,11.68) v1(59.69,0.76) v1(59.85,4.23) v1(59.85,3.43) v1(60.45,57.66) v1(60.45,55.75) v1(60.58,11.68) v1(60.96,60.96) v1(61.47,28.07) v1(61.59,113.16) v1(62.23,110.49) v1(62.23,0.76) v1(63.15,13.77) v1(63.5,113.03) v1(63.91,13.77) v1(64.01,28.07) v1(64.14,0.76) v1(66.04,97.79) v1(66.04,0.76) v1(66.8,108.2) v1(67.31,99.06) v1(67.31,97.79) v1(67.31,96.52) v1(67.31,95.25) v1(67.31,66.04) v1(67.31,63.5) v1(67.31,60.96) v1(67.31,58.42) v1(67.31,55.88) v1(67.34,8.89) v1(67.34,6.86) v1(67.44,113.16) v1(67.69,16.26) v1(67.69,15.37) v1(67.69,14.48) v1(67.72,4.36) v1(67.72,3.56) v1(67.94,0.76) v1(68.36,9.78) v1(68.36,8.89) v1(68.36,7.87) v1(68.36,6.86) v1(68.58,99.19) v1(68.58,97.41) v1(68.58,96.52) v1(68.71,106.43) v1(68.74,4.36) v1(68.74,3.56) v1(69.2,18.82) v1(69.53,18.06) v1(69.85,66.04) v1(69.85,63.5) v1(69.85,60.96) v1(69.85,58.42) v1(69.85,55.88) v1(69.76,6.48) v1(69.76,5.59) v1(70.1,113.16) v1(70.23,106.43) v1(70.36,3.56) v1(70.48,0.76) v1(71.74,86.61) v1(71.74,85.6) v1(71.69,5.59) v1(72.26,108.2) v1(72.39,113.03) v1(72.75,87.63) v1(72.75,86.61) v1(72.75,85.6) v1(73.53,0.79) v1(73.79,111.76) v1(73.82,87.63) v1(73.82,86.61) v1(73.82,85.6) v1(73.82,6.35) v1(74.93,113.03) v1(75.44,9.14) v1(75.44,7.75) v1(75.69,6.6) v1(76.2,101.09) v1(76.2,99.69) v1(76.36,1.27) v1(76.71,101.98) v1(76.96,111.63) v1(77.47,113.03) v1(77.47,104.78) v1(78.74,104.78) v1(78.9,3.81) v1(78.9,1.27) v1(79.38,48.9) v1(80.01,104.78) v1(80.01,20.95) v1(80.77,84.2) v1(80.77,82.68) v1(80.77,81.28) v1(80.77,79.63) v1(80.77,78.36) v1(80.9,25.65) v1(80.9,24.51) v1(80.9,22.86) v1(80.9,21.84) v1(81.28,39.37) v1(81.44,3.81) v1(81.44,1.27) v1(81.66,111) v1(81.69,36.2) v1(81.79,23.62) v1(81.79,20.95) v1(81.92,113.03) v1(83.57,107.57) v1(83.98,66.04) v1(83.98,63.5) v1(83.98,54.61) v1(83.98,52.07) v1(83.98,49.53) v1(85.98,25.65) v1(85.98,22.73) v1(86.36,56.52) v1(86.36,28.32) v1(86.49,67.56) v1(86.52,66.04) v1(86.52,62.23) v1(86.52,59.69) v1(86.52,54.61) v1(86.52,52.07) v1(86.52,49.53) v1(86.61,106.55) v1(86.61,19.81) v1(86.61,16.76) v1(86.61,14.86) v1(86.61,12.95) v1(86.61,11.18) v1(87,31.11) v1(87.25,104.01) v1(87.79,29.21) v1(87.79,26.67) v1(87.79,24.13) v1(87.79,21.59) v1(88.52,19.94) v1(88.52,16.76) v1(88.52,14.86) v1(88.52,12.95) v1(88.52,11.18) v1(88.77,30.99) v1(88.77,28.32) v1(88.9,106.68) v1(88.9,104.14) v1(88.9,25.4) v1(88.9,22.86) v1(89.06,78.74) v1(89.06,76.2) v1(89.06,73.66) v1(89.06,71.12) v1(89.06,68.58) v1(89.06,66.04) v1(89.06,62.23) v1(89.06,59.69) v1(89.06,57.15) v1(89.06,54.61) v1(89.06,52.07) v1(89.06,49.53) v1(89.15,100.71) v1(89.15,97.54) v1(89.15,93.98) v1(89.15,90.93) v1(89.15,87.76) v1(89.15,82.55) v1(89.15,80.14)
